# EAGLE board Single_Supply_Logic_Level_Converter-Panel (EAGLE 9.1.0), part 1 of 7
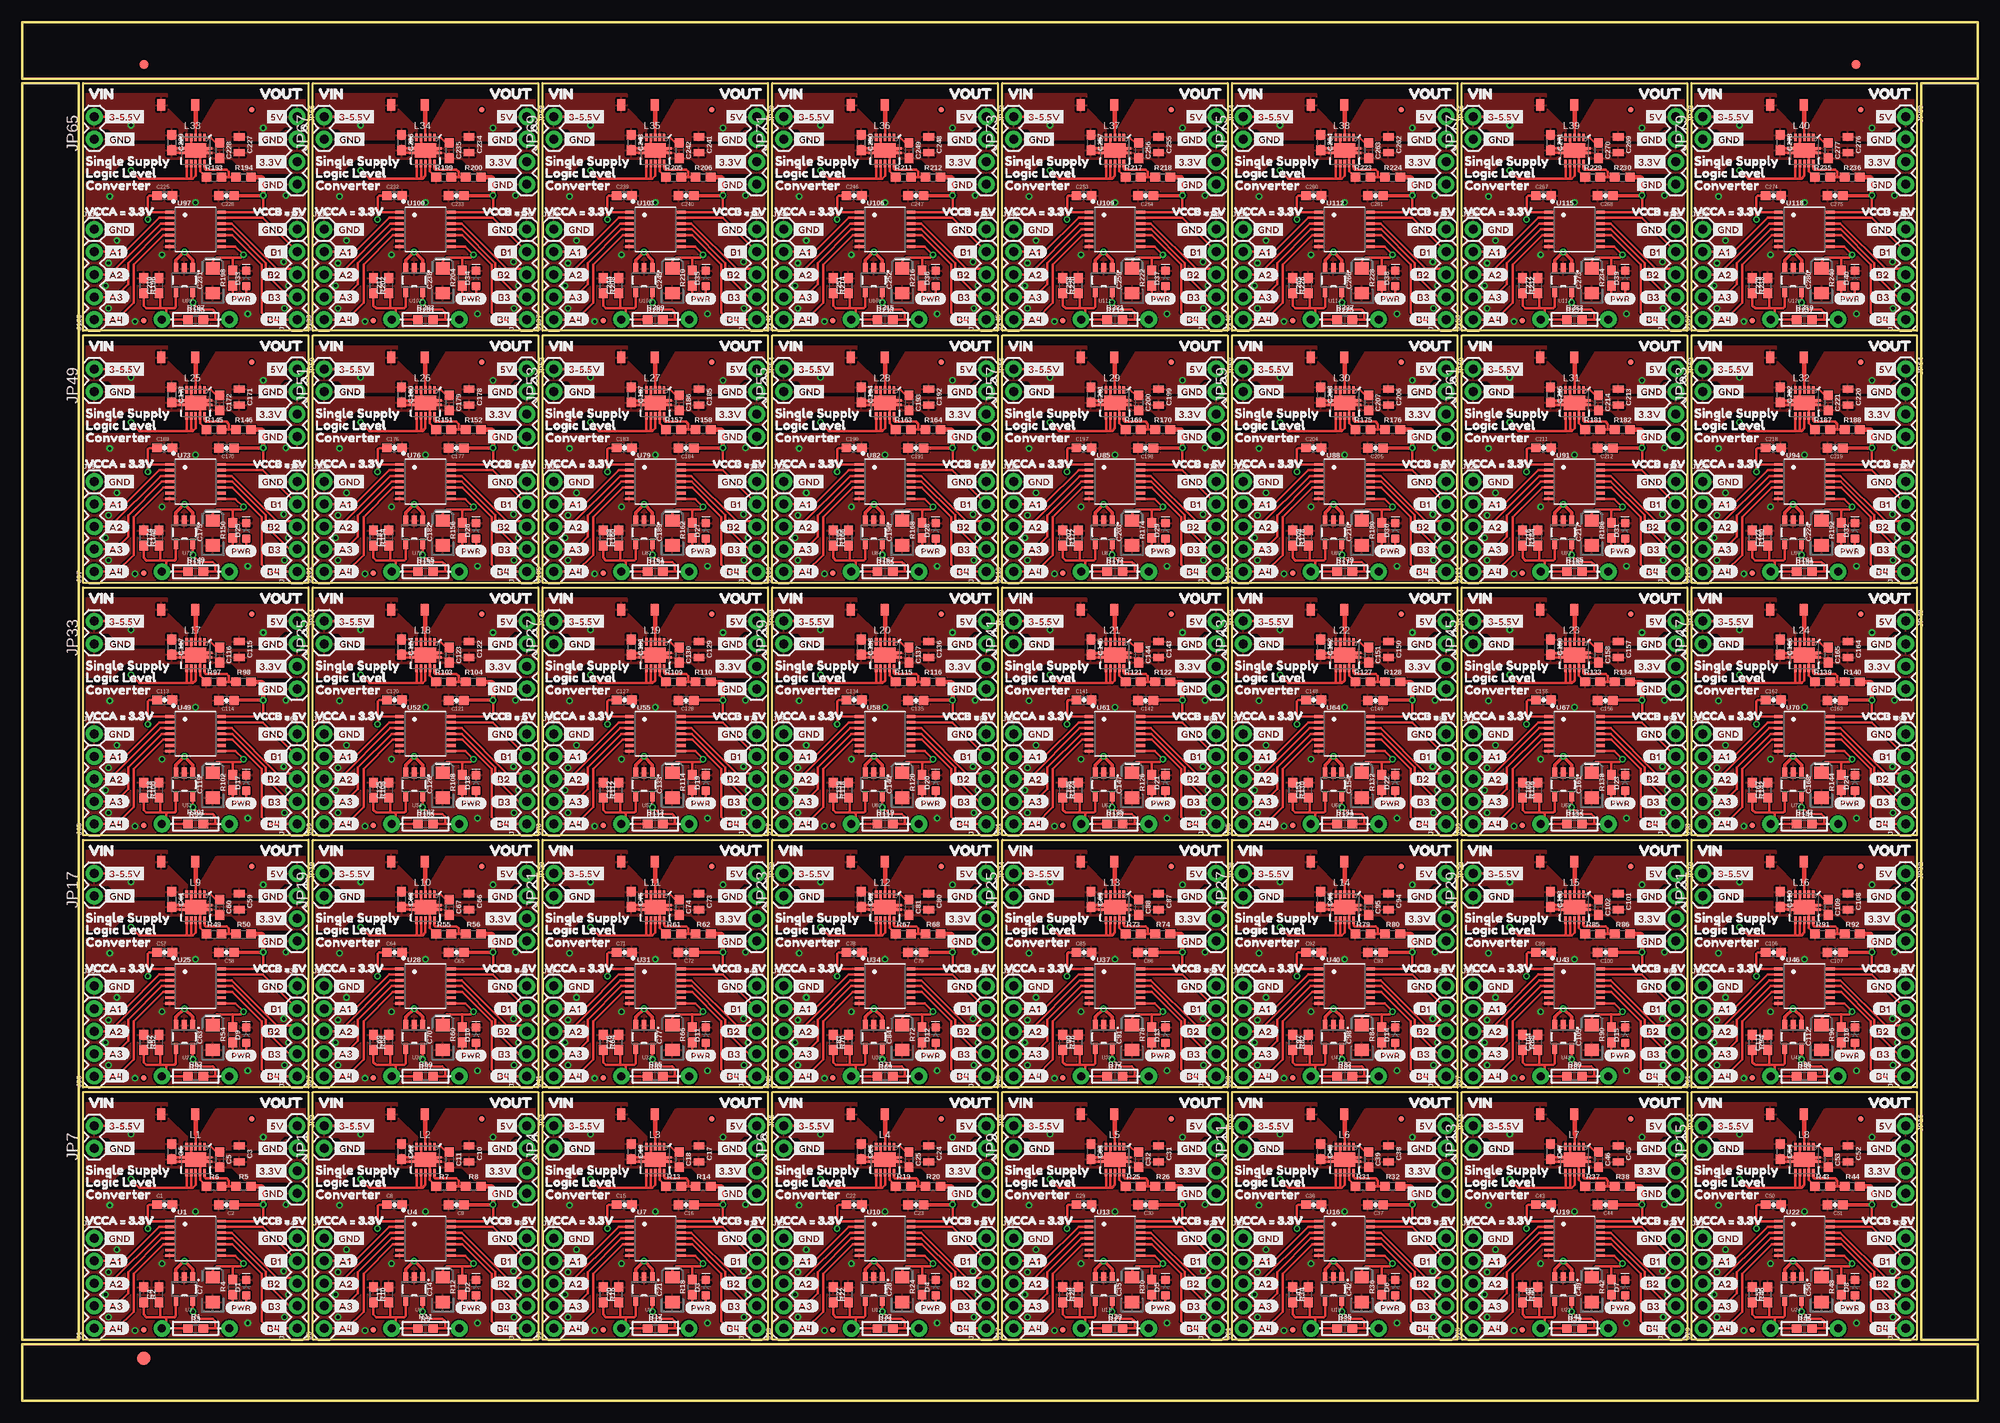
[diagram p0: board, top side]
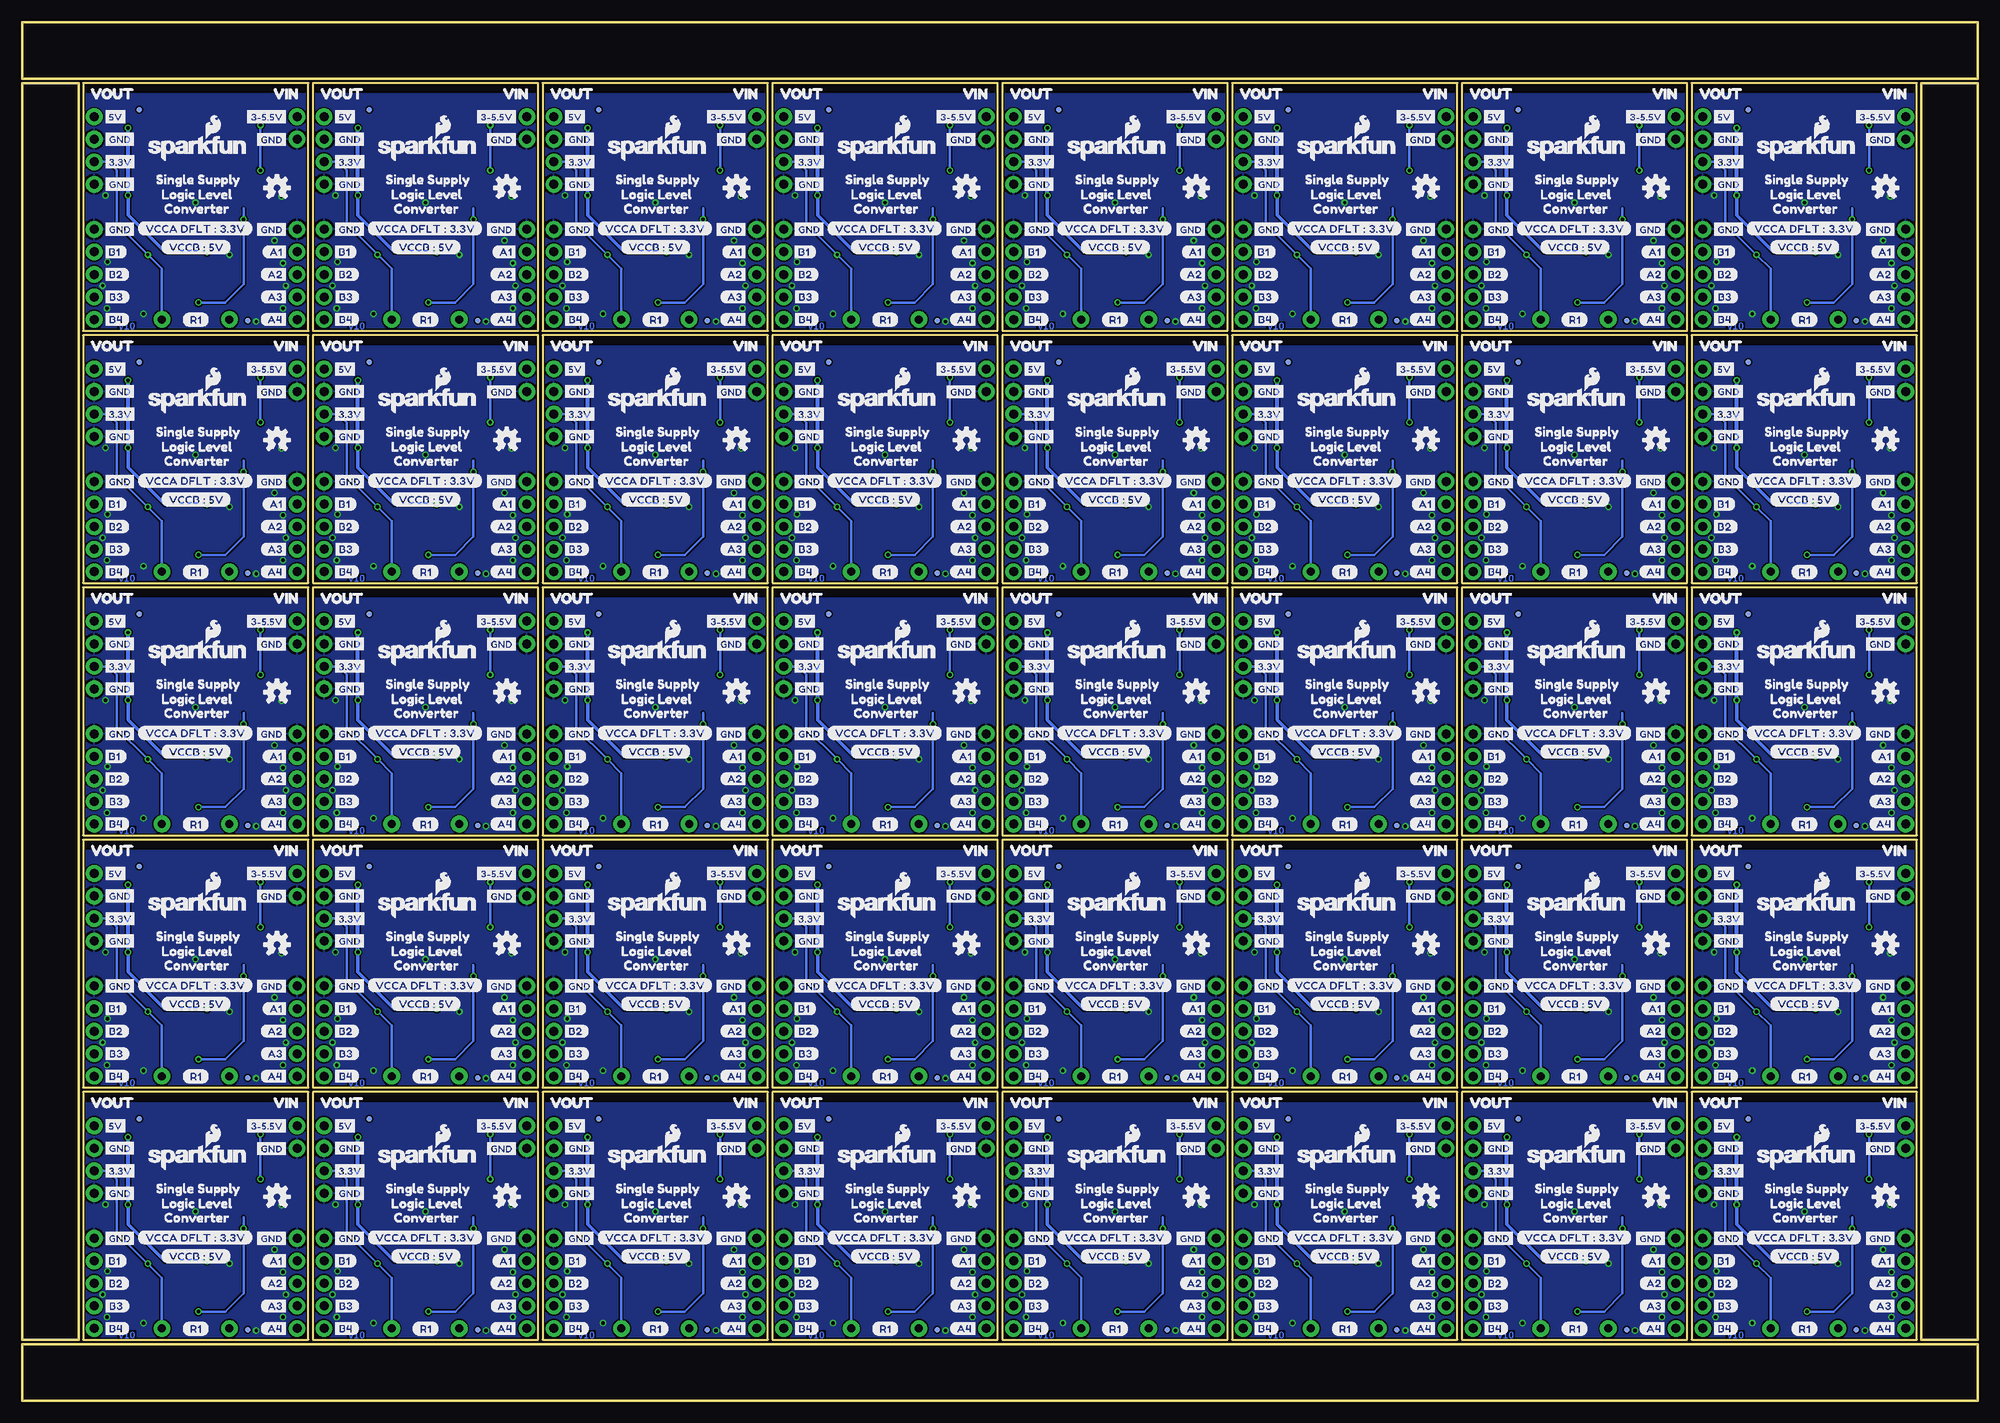
[diagram p1: board, bottom side, seen from below]

Size 220.47 x 155.45 mm. Coordinates in mm from the lower left corner, seen from the top.
Outline: 6.86,6.86 6.86,34.8 32.26,34.8 32.26,6.86 6.86,6.86
Outline: 32.77,6.86 32.77,34.8 58.17,34.8 58.17,6.86 32.77,6.86
Outline: 58.67,6.86 58.67,34.8 84.07,34.8 84.07,6.86 58.67,6.86
Outline: 84.58,6.86 84.58,34.8 109.98,34.8 109.98,6.86 84.58,6.86
Outline: 110.49,6.86 110.49,34.8 135.89,34.8 135.89,6.86 110.49,6.86
Outline: 136.4,6.86 136.4,34.8 161.8,34.8 161.8,6.86 136.4,6.86
Outline: 162.31,6.86 162.31,34.8 187.71,34.8 187.71,6.86 162.31,6.86
Outline: 188.21,6.86 188.21,34.8 213.61,34.8 213.61,6.86 188.21,6.86
Outline: 6.86,35.31 6.86,63.25 32.26,63.25 32.26,35.31 6.86,35.31
Outline: 32.77,35.31 32.77,63.25 58.17,63.25 58.17,35.31 32.77,35.31
Outline: 58.67,35.31 58.67,63.25 84.07,63.25 84.07,35.31 58.67,35.31
Outline: 84.58,35.31 84.58,63.25 109.98,63.25 109.98,35.31 84.58,35.31
Outline: 110.49,35.31 110.49,63.25 135.89,63.25 135.89,35.31 110.49,35.31
Outline: 136.4,35.31 136.4,63.25 161.8,63.25 161.8,35.31 136.4,35.31
Outline: 162.31,35.31 162.31,63.25 187.71,63.25 187.71,35.31 162.31,35.31
Outline: 188.21,35.31 188.21,63.25 213.61,63.25 213.61,35.31 188.21,35.31
Outline: 6.86,63.75 6.86,91.69 32.26,91.69 32.26,63.75 6.86,63.75
Outline: 32.77,63.75 32.77,91.69 58.17,91.69 58.17,63.75 32.77,63.75
Outline: 58.67,63.75 58.67,91.69 84.07,91.69 84.07,63.75 58.67,63.75
Outline: 84.58,63.75 84.58,91.69 109.98,91.69 109.98,63.75 84.58,63.75
Outline: 110.49,63.75 110.49,91.69 135.89,91.69 135.89,63.75 110.49,63.75
Outline: 136.4,63.75 136.4,91.69 161.8,91.69 161.8,63.75 136.4,63.75
Outline: 162.31,63.75 162.31,91.69 187.71,91.69 187.71,63.75 162.31,63.75
Outline: 188.21,63.75 188.21,91.69 213.61,91.69 213.61,63.75 188.21,63.75
Outline: 6.86,92.2 6.86,120.14 32.26,120.14 32.26,92.2 6.86,92.2
Outline: 32.77,92.2 32.77,120.14 58.17,120.14 58.17,92.2 32.77,92.2
Outline: 58.67,92.2 58.67,120.14 84.07,120.14 84.07,92.2 58.67,92.2
Outline: 84.58,92.2 84.58,120.14 109.98,120.14 109.98,92.2 84.58,92.2
Outline: 110.49,92.2 110.49,120.14 135.89,120.14 135.89,92.2 110.49,92.2
Outline: 136.4,92.2 136.4,120.14 161.8,120.14 161.8,92.2 136.4,92.2
Outline: 162.31,92.2 162.31,120.14 187.71,120.14 187.71,92.2 162.31,92.2
Outline: 188.21,92.2 188.21,120.14 213.61,120.14 213.61,92.2 188.21,92.2
Outline: 6.86,120.65 6.86,148.59 32.26,148.59 32.26,120.65 6.86,120.65
Outline: 32.77,120.65 32.77,148.59 58.17,148.59 58.17,120.65 32.77,120.65
Outline: 58.67,120.65 58.67,148.59 84.07,148.59 84.07,120.65 58.67,120.65
Outline: 84.58,120.65 84.58,148.59 109.98,148.59 109.98,120.65 84.58,120.65
Outline: 110.49,120.65 110.49,148.59 135.89,148.59 135.89,120.65 110.49,120.65
Outline: 136.4,120.65 136.4,148.59 161.8,148.59 161.8,120.65 136.4,120.65
Outline: 162.31,120.65 162.31,148.59 187.71,148.59 187.71,120.65 162.31,120.65
Outline: 188.21,120.65 188.21,148.59 213.61,148.59 213.61,120.65 188.21,120.65
Outline: 0,6.35 220.47,6.35 220.47,0 0,0 0,6.35
Outline: 214.12,148.59 220.47,148.59 220.47,6.86 214.12,6.86 214.12,148.59
Outline: 0,155.45 220.47,155.45 220.47,149.1 0,149.1 0,155.45
Outline: 0,148.59 6.35,148.59 6.35,6.86 0,6.86 0,148.59
Copper layers (1*16): Top 0.035mm / dielectric 1.5mm / Bottom 0.035mm
Design rules "SparkFun-2-layer-PCBWay-LIMIT": minimum track width 6mil, minimum drill 0.3mm, track to track 6mil, track to pad 6mil, pad to pad 6mil, via to via 6mil, smd to smd 6mil, copper to edge 6mil, drill to drill 6mil, minimum pad ring 7mil, minimum via ring 7mil, stop-mask expansion 4mil, vias tented up to drill 25mil, thermal gap 10mil
Net classes: 0 Default: width 0.203 mm

## Footprints (pad centres in the part's own frame; a part is rotated, then mirrored left to right if it is on the bottom)
0603-CAP = smd 1.1 x 1: 1 -0.85,0; 2 0.85,0
0805 = smd 0.8 x 1.2: 1 -0.9,0; 2 0.9,0
0603 = smd 1.1 x 1: 1 -0.85,0; 2 0.85,0
EIA3216 = smd 1.4 x 1.6: + 1.4,0; - -1.4,0
LED-0603 = smd 1 x 1: A -0.877,0; C 0.877,0
FIDUCIAL-1X2 = smd 1 x 1: 1 0,0
FIDUCIAL-1.5X3 = smd 1.5 x 1.5: 1 0,0
FIDUCIAL-MICRO = smd 0.635 x 0.635: 1 0,0
1X04 = drill 1.016 pad 1.88: 1 0,0; 2 2.54,0; 3 5.08,0; 4 7.62,0
1X01 = drill 1.016 pad 1.88: 1 0,0
1X02 = drill 1.016 pad 1.88: 1 0,0; 2 2.54,0
INDUCTOR_2.2UH = smd 0.9 x 1.3: P$1 -1.9,0; P$2 1.9,0
AXIAL-0.3 = drill 0.9 pad 1.88: P$1 -3.81,0; P$2 3.81,0
TSSOP14 = smd 0.305 x 0.991: 1 -1.95,-2.918; 2 -1.3,-2.918; 3 -0.65,-2.918; 4 0,-2.918; 5 0.65,-2.918; 6 1.3,-2.918; 7 1.95,-2.918; 8 1.95,2.918; 9 1.3,2.918; 10 0.65,2.918; 11 0,2.918; 12 -0.65,2.918; 13 -1.3,2.918; 14 -1.95,2.918
QFN-10_PAD = smd 0.297 x 0.85: 1 -1,-1.475; 2 -0.5,-1.475; 3 0,-1.475; 4 0.5,-1.475; 5 1,-1.475; 6 1,1.475; 7 0.5,1.475; 8 0,1.475; 9 -0.5,1.475; 10 -1,1.475 | smd 0.7 x 0.28: 11 -1.5,0.25; 12 -1.5,-0.25; 13 1.5,0.25; 14 1.5,-0.25 | smd 2.4 x 1.65: 15 0,0
SOT23-5 = smd 0.55 x 1.2: 1 -0.95,-1.3; 2 0,-1.3; 3 0.95,-1.3; 4 0.95,1.3; 5 -0.95,1.3

## Placement (x,y rotation side)
C1  0.1uF  [0603-CAP]  16.07,22.1 0 top
C2  0.1uF  [0603-CAP]  23.03,22.07 180 top
C3  22uF  [0805]  24.48,27.81 270 top
C4  470pF  [0603]  15.43,11.94 90 top
C5  0.1uF  [0603]  22.26,27.18 270 top
C6  10uF  [0603]  16.86,28.08 270 top
C7  10uF  [EIA3216]  21.49,12.5 90 top
C8  0.1uF  [0603-CAP]  41.97,22.1 0 top
C9  0.1uF  [0603-CAP]  48.94,22.07 180 top
C10  22uF  [0805]  50.39,27.81 270 top
C11  0.1uF  [0603]  48.16,27.18 270 top
C12  10uF  [0603]  42.76,28.08 270 top
C13  470pF  [0603]  41.34,11.94 90 top
C14  10uF  [EIA3216]  47.4,12.5 90 top
C15  0.1uF  [0603-CAP]  67.88,22.1 0 top
C16  0.1uF  [0603-CAP]  74.85,22.07 180 top
C17  22uF  [0805]  76.3,27.81 270 top
C18  0.1uF  [0603]  74.07,27.18 270 top
C19  10uF  [0603]  68.67,28.08 270 top
C20  470pF  [0603]  67.25,11.94 90 top
C21  10uF  [EIA3216]  73.31,12.5 90 top
C22  0.1uF  [0603-CAP]  93.79,22.1 0 top
C23  0.1uF  [0603-CAP]  100.76,22.07 180 top
C24  22uF  [0805]  102.2,27.81 270 top
C25  0.1uF  [0603]  99.98,27.18 270 top
C26  10uF  [0603]  94.58,28.08 270 top
C27  470pF  [0603]  93.15,11.94 90 top
C28  10uF  [EIA3216]  99.22,12.5 90 top
C29  0.1uF  [0603-CAP]  119.7,22.1 0 top
C30  0.1uF  [0603-CAP]  126.66,22.07 180 top
C31  22uF  [0805]  128.11,27.81 270 top
C32  0.1uF  [0603]  125.89,27.18 270 top
C33  10uF  [0603]  120.49,28.08 270 top
C34  470pF  [0603]  119.06,11.94 90 top
C35  10uF  [EIA3216]  125.13,12.5 90 top
C36  0.1uF  [0603-CAP]  145.61,22.1 0 top
C37  0.1uF  [0603-CAP]  152.57,22.07 180 top
C38  22uF  [0805]  154.02,27.81 270 top
C39  0.1uF  [0603]  151.8,27.18 270 top
C40  10uF  [0603]  146.4,28.08 270 top
C41  470pF  [0603]  144.97,11.94 90 top
C42  10uF  [EIA3216]  151.03,12.5 90 top
C43  0.1uF  [0603-CAP]  171.51,22.1 0 top
C44  0.1uF  [0603-CAP]  178.48,22.07 180 top
C45  22uF  [0805]  179.93,27.81 270 top
C46  0.1uF  [0603]  177.7,27.18 270 top
C47  10uF  [0603]  172.3,28.08 270 top
C48  470pF  [0603]  170.88,11.94 90 top
C49  10uF  [EIA3216]  176.94,12.5 90 top
C50  0.1uF  [0603-CAP]  197.42,22.1 0 top
C51  0.1uF  [0603-CAP]  204.39,22.07 180 top
C52  22uF  [0805]  205.84,27.81 270 top
C53  0.1uF  [0603]  203.61,27.18 270 top
C54  10uF  [0603]  198.21,28.08 270 top
C55  470pF  [0603]  196.79,11.94 90 top
C56  10uF  [EIA3216]  202.85,12.5 90 top
C57  0.1uF  [0603-CAP]  16.07,50.55 0 top
C58  0.1uF  [0603-CAP]  23.03,50.52 180 top
C59  22uF  [0805]  24.48,56.26 270 top
C60  0.1uF  [0603]  22.26,55.63 270 top
C61  10uF  [0603]  16.86,56.52 270 top
C62  470pF  [0603]  15.43,40.39 90 top
C63  10uF  [EIA3216]  21.49,40.94 90 top
C64  0.1uF  [0603-CAP]  41.97,50.55 0 top
C65  0.1uF  [0603-CAP]  48.94,50.52 180 top
C66  22uF  [0805]  50.39,56.26 270 top
C67  0.1uF  [0603]  48.16,55.63 270 top
C68  10uF  [0603]  42.76,56.52 270 top
C69  470pF  [0603]  41.34,40.39 90 top
C70  10uF  [EIA3216]  47.4,40.94 90 top
C71  0.1uF  [0603-CAP]  67.88,50.55 0 top
C72  0.1uF  [0603-CAP]  74.85,50.52 180 top
C73  22uF  [0805]  76.3,56.26 270 top
C74  0.1uF  [0603]  74.07,55.63 270 top
C75  10uF  [0603]  68.67,56.52 270 top
C76  470pF  [0603]  67.25,40.39 90 top
C77  10uF  [EIA3216]  73.31,40.94 90 top
C78  0.1uF  [0603-CAP]  93.79,50.55 0 top
C79  0.1uF  [0603-CAP]  100.76,50.52 180 top
C80  22uF  [0805]  102.2,56.26 270 top
C81  0.1uF  [0603]  99.98,55.63 270 top
C82  10uF  [0603]  94.58,56.52 270 top
C83  470pF  [0603]  93.15,40.39 90 top
C84  10uF  [EIA3216]  99.22,40.94 90 top
C85  0.1uF  [0603-CAP]  119.7,50.55 0 top
C86  0.1uF  [0603-CAP]  126.66,50.52 180 top
C87  22uF  [0805]  128.11,56.26 270 top
C88  0.1uF  [0603]  125.89,55.63 270 top
C89  10uF  [0603]  120.49,56.52 270 top
C90  470pF  [0603]  119.06,40.39 90 top
C91  10uF  [EIA3216]  125.13,40.94 90 top
C92  0.1uF  [0603-CAP]  145.61,50.55 0 top
C93  0.1uF  [0603-CAP]  152.57,50.52 180 top
C94  22uF  [0805]  154.02,56.26 270 top
C95  0.1uF  [0603]  151.8,55.63 270 top
C96  10uF  [0603]  146.4,56.52 270 top
C97  470pF  [0603]  144.97,40.39 90 top
C98  10uF  [EIA3216]  151.03,40.94 90 top
C99  0.1uF  [0603-CAP]  171.51,50.55 0 top
C100  0.1uF  [0603-CAP]  178.48,50.52 180 top
C101  22uF  [0805]  179.93,56.26 270 top
C102  0.1uF  [0603]  177.7,55.63 270 top
C103  10uF  [0603]  172.3,56.52 270 top
C104  470pF  [0603]  170.88,40.39 90 top
C105  10uF  [EIA3216]  176.94,40.94 90 top
C106  0.1uF  [0603-CAP]  197.42,50.55 0 top
C107  0.1uF  [0603-CAP]  204.39,50.52 180 top
C108  22uF  [0805]  205.84,56.26 270 top
C109  0.1uF  [0603]  203.61,55.63 270 top
C110  10uF  [0603]  198.21,56.52 270 top
C111  470pF  [0603]  196.79,40.39 90 top
C112  10uF  [EIA3216]  202.85,40.94 90 top
C113  0.1uF  [0603-CAP]  16.07,78.99 0 top
C114  0.1uF  [0603-CAP]  23.03,78.97 180 top
C115  22uF  [0805]  24.48,84.71 270 top
C116  0.1uF  [0603]  22.26,84.07 270 top
C117  10uF  [0603]  16.86,84.97 270 top
C118  470pF  [0603]  15.43,68.83 90 top
C119  10uF  [EIA3216]  21.49,69.39 90 top
C120  0.1uF  [0603-CAP]  41.97,78.99 0 top
C121  0.1uF  [0603-CAP]  48.94,78.97 180 top
C122  22uF  [0805]  50.39,84.71 270 top
C123  0.1uF  [0603]  48.16,84.07 270 top
C124  10uF  [0603]  42.76,84.97 270 top
C125  470pF  [0603]  41.34,68.83 90 top
C126  10uF  [EIA3216]  47.4,69.39 90 top
C127  0.1uF  [0603-CAP]  67.88,78.99 0 top
C128  0.1uF  [0603-CAP]  74.85,78.97 180 top
C129  22uF  [0805]  76.3,84.71 270 top
C130  0.1uF  [0603]  74.07,84.07 270 top
C131  10uF  [0603]  68.67,84.97 270 top
C132  470pF  [0603]  67.25,68.83 90 top
C133  10uF  [EIA3216]  73.31,69.39 90 top
C134  0.1uF  [0603-CAP]  93.79,78.99 0 top
C135  0.1uF  [0603-CAP]  100.76,78.97 180 top
C136  22uF  [0805]  102.2,84.71 270 top
C137  0.1uF  [0603]  99.98,84.07 270 top
C138  10uF  [0603]  94.58,84.97 270 top
C139  470pF  [0603]  93.15,68.83 90 top
C140  10uF  [EIA3216]  99.22,69.39 90 top
C141  0.1uF  [0603-CAP]  119.7,78.99 0 top
C142  0.1uF  [0603-CAP]  126.66,78.97 180 top
C143  22uF  [0805]  128.11,84.71 270 top
C144  0.1uF  [0603]  125.89,84.07 270 top
C145  10uF  [0603]  120.49,84.97 270 top
C146  470pF  [0603]  119.06,68.83 90 top
C147  10uF  [EIA3216]  125.13,69.39 90 top
C148  0.1uF  [0603-CAP]  145.61,78.99 0 top
C149  0.1uF  [0603-CAP]  152.57,78.97 180 top
C150  22uF  [0805]  154.02,84.71 270 top
C151  0.1uF  [0603]  151.8,84.07 270 top
C152  10uF  [0603]  146.4,84.97 270 top
C153  470pF  [0603]  144.97,68.83 90 top
C154  10uF  [EIA3216]  151.03,69.39 90 top
C155  0.1uF  [0603-CAP]  171.51,78.99 0 top
C156  0.1uF  [0603-CAP]  178.48,78.97 180 top
C157  22uF  [0805]  179.93,84.71 270 top
C158  0.1uF  [0603]  177.7,84.07 270 top
C159  10uF  [0603]  172.3,84.97 270 top
C160  470pF  [0603]  170.88,68.83 90 top
C161  10uF  [EIA3216]  176.94,69.39 90 top
C162  0.1uF  [0603-CAP]  197.42,78.99 0 top
C163  0.1uF  [0603-CAP]  204.39,78.97 180 top
C164  22uF  [0805]  205.84,84.71 270 top
C165  0.1uF  [0603]  203.61,84.07 270 top
C166  10uF  [0603]  198.21,84.97 270 top
C167  470pF  [0603]  196.79,68.83 90 top
C168  10uF  [EIA3216]  202.85,69.39 90 top
C169  0.1uF  [0603-CAP]  16.07,107.44 0 top
C170  0.1uF  [0603-CAP]  23.03,107.42 180 top
C171  22uF  [0805]  24.48,113.16 270 top
C172  0.1uF  [0603]  22.26,112.52 270 top
C173  10uF  [0603]  16.86,113.42 270 top
C174  470pF  [0603]  15.43,97.28 90 top
C175  10uF  [EIA3216]  21.49,97.84 90 top
C176  0.1uF  [0603-CAP]  41.97,107.44 0 top
C177  0.1uF  [0603-CAP]  48.94,107.42 180 top
C178  22uF  [0805]  50.39,113.16 270 top
C179  0.1uF  [0603]  48.16,112.52 270 top
C180  10uF  [0603]  42.76,113.42 270 top
C181  470pF  [0603]  41.34,97.28 90 top
C182  10uF  [EIA3216]  47.4,97.84 90 top
C183  0.1uF  [0603-CAP]  67.88,107.44 0 top
C184  0.1uF  [0603-CAP]  74.85,107.42 180 top
C185  22uF  [0805]  76.3,113.16 270 top
C186  0.1uF  [0603]  74.07,112.52 270 top
C187  10uF  [0603]  68.67,113.42 270 top
C188  470pF  [0603]  67.25,97.28 90 top
C189  10uF  [EIA3216]  73.31,97.84 90 top
C190  0.1uF  [0603-CAP]  93.79,107.44 0 top
C191  0.1uF  [0603-CAP]  100.76,107.42 180 top
C192  22uF  [0805]  102.2,113.16 270 top
C193  0.1uF  [0603]  99.98,112.52 270 top
C194  10uF  [0603]  94.58,113.42 270 top
C195  470pF  [0603]  93.15,97.28 90 top
C196  10uF  [EIA3216]  99.22,97.84 90 top
C197  0.1uF  [0603-CAP]  119.7,107.44 0 top
C198  0.1uF  [0603-CAP]  126.66,107.42 180 top
C199  22uF  [0805]  128.11,113.16 270 top
C200  0.1uF  [0603]  125.89,112.52 270 top
C201  10uF  [0603]  120.49,113.42 270 top
C202  470pF  [0603]  119.06,97.28 90 top
C203  10uF  [EIA3216]  125.13,97.84 90 top
C204  0.1uF  [0603-CAP]  145.61,107.44 0 top
C205  0.1uF  [0603-CAP]  152.57,107.42 180 top
C206  22uF  [0805]  154.02,113.16 270 top
C207  0.1uF  [0603]  151.8,112.52 270 top
C208  10uF  [0603]  146.4,113.42 270 top
C209  470pF  [0603]  144.97,97.28 90 top
C210  10uF  [EIA3216]  151.03,97.84 90 top
C211  0.1uF  [0603-CAP]  171.51,107.44 0 top
C212  0.1uF  [0603-CAP]  178.48,107.42 180 top
C213  22uF  [0805]  179.93,113.16 270 top
C214  0.1uF  [0603]  177.7,112.52 270 top
C215  10uF  [0603]  172.3,113.42 270 top
C216  470pF  [0603]  170.88,97.28 90 top
C217  10uF  [EIA3216]  176.94,97.84 90 top
C218  0.1uF  [0603-CAP]  197.42,107.44 0 top
C219  0.1uF  [0603-CAP]  204.39,107.42 180 top
C220  22uF  [0805]  205.84,113.16 270 top
C221  0.1uF  [0603]  203.61,112.52 270 top
C222  10uF  [0603]  198.21,113.42 270 top
C223  470pF  [0603]  196.79,97.28 90 top
C224  10uF  [EIA3216]  202.85,97.84 90 top
C225  0.1uF  [0603-CAP]  16.07,135.89 0 top
C226  0.1uF  [0603-CAP]  23.03,135.86 180 top
C227  22uF  [0805]  24.48,141.61 270 top
C228  0.1uF  [0603]  22.26,140.97 270 top
C229  10uF  [0603]  16.86,141.87 270 top
C230  470pF  [0603]  15.43,125.73 90 top
C231  10uF  [EIA3216]  21.49,126.29 90 top
C232  0.1uF  [0603-CAP]  41.97,135.89 0 top
C233  0.1uF  [0603-CAP]  48.94,135.86 180 top
C234  22uF  [0805]  50.39,141.61 270 top
C235  0.1uF  [0603]  48.16,140.97 270 top
C236  10uF  [0603]  42.76,141.87 270 top
C237  470pF  [0603]  41.34,125.73 90 top
C238  10uF  [EIA3216]  47.4,126.29 90 top
C239  0.1uF  [0603-CAP]  67.88,135.89 0 top
C240  0.1uF  [0603-CAP]  74.85,135.86 180 top
C241  22uF  [0805]  76.3,141.61 270 top
C242  0.1uF  [0603]  74.07,140.97 270 top
C243  10uF  [0603]  68.67,141.87 270 top
C244  470pF  [0603]  67.25,125.73 90 top
C245  10uF  [EIA3216]  73.31,126.29 90 top
C246  0.1uF  [0603-CAP]  93.79,135.89 0 top
C247  0.1uF  [0603-CAP]  100.76,135.86 180 top
C248  22uF  [0805]  102.2,141.61 270 top
C249  0.1uF  [0603]  99.98,140.97 270 top
C250  10uF  [0603]  94.58,141.87 270 top
C251  470pF  [0603]  93.15,125.73 90 top
C252  10uF  [EIA3216]  99.22,126.29 90 top
C253  0.1uF  [0603-CAP]  119.7,135.89 0 top
C254  0.1uF  [0603-CAP]  126.66,135.86 180 top
C255  22uF  [0805]  128.11,141.61 270 top
C256  0.1uF  [0603]  125.89,140.97 270 top
C257  10uF  [0603]  120.49,141.87 270 top
C258  470pF  [0603]  119.06,125.73 90 top
C259  10uF  [EIA3216]  125.13,126.29 90 top
C260  0.1uF  [0603-CAP]  145.61,135.89 0 top
C261  0.1uF  [0603-CAP]  152.57,135.86 180 top
C262  22uF  [0805]  154.02,141.61 270 top
C263  0.1uF  [0603]  151.8,140.97 270 top
C264  10uF  [0603]  146.4,141.87 270 top
C265  470pF  [0603]  144.97,125.73 90 top
C266  10uF  [EIA3216]  151.03,126.29 90 top
C267  0.1uF  [0603-CAP]  171.51,135.89 0 top
C268  0.1uF  [0603-CAP]  178.48,135.86 180 top
C269  22uF  [0805]  179.93,141.61 270 top
C270  0.1uF  [0603]  177.7,140.97 270 top
C271  10uF  [0603]  172.3,141.87 270 top
C272  470pF  [0603]  170.88,125.73 90 top
C273  10uF  [EIA3216]  176.94,126.29 90 top
C274  0.1uF  [0603-CAP]  197.42,135.89 0 top
C275  0.1uF  [0603-CAP]  204.39,135.86 180 top
C276  22uF  [0805]  205.84,141.61 270 top
C277  0.1uF  [0603]  203.61,140.97 270 top
C278  10uF  [0603]  198.21,141.87 270 top
C279  470pF  [0603]  196.79,125.73 90 top
C280  10uF  [EIA3216]  202.85,126.29 90 top
D1  RED  [LED-0603]  25.26,12.75 90 top
D2  RED  [LED-0603]  51.17,12.75 90 top
D3  RED  [LED-0603]  77.08,12.75 90 top
D4  RED  [LED-0603]  102.98,12.75 90 top
D5  RED  [LED-0603]  128.89,12.75 90 top
D6  RED  [LED-0603]  154.8,12.75 90 top
D7  RED  [LED-0603]  180.71,12.75 90 top
D8  RED  [LED-0603]  206.62,12.75 90 top
D9  RED  [LED-0603]  25.26,41.2 90 top
D10  RED  [LED-0603]  51.17,41.2 90 top
D11  RED  [LED-0603]  77.08,41.2 90 top
D12  RED  [LED-0603]  102.98,41.2 90 top
D13  RED  [LED-0603]  128.89,41.2 90 top
D14  RED  [LED-0603]  154.8,41.2 90 top
D15  RED  [LED-0603]  180.71,41.2 90 top
D16  RED  [LED-0603]  206.62,41.2 90 top
D17  RED  [LED-0603]  25.26,69.65 90 top
D18  RED  [LED-0603]  51.17,69.65 90 top
D19  RED  [LED-0603]  77.08,69.65 90 top
D20  RED  [LED-0603]  102.98,69.65 90 top
D21  RED  [LED-0603]  128.89,69.65 90 top
D22  RED  [LED-0603]  154.8,69.65 90 top
D23  RED  [LED-0603]  180.71,69.65 90 top
D24  RED  [LED-0603]  206.62,69.65 90 top
D25  RED  [LED-0603]  25.26,98.09 90 top
D26  RED  [LED-0603]  51.17,98.09 90 top
D27  RED  [LED-0603]  77.08,98.09 90 top
D28  RED  [LED-0603]  102.98,98.09 90 top
D29  RED  [LED-0603]  128.89,98.09 90 top
D30  RED  [LED-0603]  154.8,98.09 90 top
D31  RED  [LED-0603]  180.71,98.09 90 top
D32  RED  [LED-0603]  206.62,98.09 90 top
D33  RED  [LED-0603]  25.26,126.54 90 top
D34  RED  [LED-0603]  51.17,126.54 90 top
D35  RED  [LED-0603]  77.08,126.54 90 top
D36  RED  [LED-0603]  102.98,126.54 90 top
D37  RED  [LED-0603]  128.89,126.54 90 top
D38  RED  [LED-0603]  154.8,126.54 90 top
D39  RED  [LED-0603]  180.71,126.54 90 top
D40  RED  [LED-0603]  206.62,126.54 90 top
E$1  [FIDUCIAL-1X2]  13.72,150.69 0 top
E$2  [FIDUCIAL-1X2]  206.76,150.69 0 top
E$3  [FIDUCIAL-1.5X3]  13.72,4.76 0 top
FD1  FIDUCIALUFIDUCIAL  [FIDUCIAL-MICRO]  25.91,31.78 0 top
FD2  FIDUCIALUFIDUCIAL  [FIDUCIAL-MICRO]  25.91,31.78 0 bottom
FD3  FIDUCIALUFIDUCIAL  [FIDUCIAL-MICRO]  13.68,7.97 0 top
FD4  FIDUCIALUFIDUCIAL  [FIDUCIAL-MICRO]  13.68,7.97 0 bottom
FD5  FIDUCIALUFIDUCIAL  [FIDUCIAL-MICRO]  51.82,31.78 0 top
FD6  FIDUCIALUFIDUCIAL  [FIDUCIAL-MICRO]  51.82,31.78 0 bottom
FD7  FIDUCIALUFIDUCIAL  [FIDUCIAL-MICRO]  39.59,7.97 0 bottom
FD8  FIDUCIALUFIDUCIAL  [FIDUCIAL-MICRO]  39.59,7.97 0 top
FD9  FIDUCIALUFIDUCIAL  [FIDUCIAL-MICRO]  77.72,31.78 0 top
FD10  FIDUCIALUFIDUCIAL  [FIDUCIAL-MICRO]  77.72,31.78 0 bottom
FD11  FIDUCIALUFIDUCIAL  [FIDUCIAL-MICRO]  65.5,7.97 0 bottom
FD12  FIDUCIALUFIDUCIAL  [FIDUCIAL-MICRO]  65.5,7.97 0 top
FD13  FIDUCIALUFIDUCIAL  [FIDUCIAL-MICRO]  103.63,31.78 0 top
FD14  FIDUCIALUFIDUCIAL  [FIDUCIAL-MICRO]  103.63,31.78 0 bottom
FD15  FIDUCIALUFIDUCIAL  [FIDUCIAL-MICRO]  91.41,7.97 0 bottom
FD16  FIDUCIALUFIDUCIAL  [FIDUCIAL-MICRO]  91.41,7.97 0 top
FD17  FIDUCIALUFIDUCIAL  [FIDUCIAL-MICRO]  129.54,31.78 0 top
FD18  FIDUCIALUFIDUCIAL  [FIDUCIAL-MICRO]  129.54,31.78 0 bottom
FD19  FIDUCIALUFIDUCIAL  [FIDUCIAL-MICRO]  117.32,7.97 0 bottom
FD20  FIDUCIALUFIDUCIAL  [FIDUCIAL-MICRO]  117.32,7.97 0 top
FD21  FIDUCIALUFIDUCIAL  [FIDUCIAL-MICRO]  155.45,31.78 0 top
FD22  FIDUCIALUFIDUCIAL  [FIDUCIAL-MICRO]  155.45,31.78 0 bottom
FD23  FIDUCIALUFIDUCIAL  [FIDUCIAL-MICRO]  143.22,7.97 0 bottom
FD24  FIDUCIALUFIDUCIAL  [FIDUCIAL-MICRO]  143.22,7.97 0 top
FD25  FIDUCIALUFIDUCIAL  [FIDUCIAL-MICRO]  181.36,31.78 0 top
FD26  FIDUCIALUFIDUCIAL  [FIDUCIAL-MICRO]  181.36,31.78 0 bottom
FD27  FIDUCIALUFIDUCIAL  [FIDUCIAL-MICRO]  169.13,7.97 0 bottom
FD28  FIDUCIALUFIDUCIAL  [FIDUCIAL-MICRO]  169.13,7.97 0 top
FD29  FIDUCIALUFIDUCIAL  [FIDUCIAL-MICRO]  207.26,31.78 0 top
FD30  FIDUCIALUFIDUCIAL  [FIDUCIAL-MICRO]  207.26,31.78 0 bottom
FD31  FIDUCIALUFIDUCIAL  [FIDUCIAL-MICRO]  195.04,7.97 0 bottom
FD32  FIDUCIALUFIDUCIAL  [FIDUCIAL-MICRO]  195.04,7.97 0 top
FD33  FIDUCIALUFIDUCIAL  [FIDUCIAL-MICRO]  25.91,60.23 0 top
FD34  FIDUCIALUFIDUCIAL  [FIDUCIAL-MICRO]  25.91,60.23 0 bottom
FD35  FIDUCIALUFIDUCIAL  [FIDUCIAL-MICRO]  13.68,36.42 0 bottom
FD36  FIDUCIALUFIDUCIAL  [FIDUCIAL-MICRO]  13.68,36.42 0 top
FD37  FIDUCIALUFIDUCIAL  [FIDUCIAL-MICRO]  51.82,60.23 0 top
FD38  FIDUCIALUFIDUCIAL  [FIDUCIAL-MICRO]  51.82,60.23 0 bottom
FD39  FIDUCIALUFIDUCIAL  [FIDUCIAL-MICRO]  39.59,36.42 0 bottom
FD40  FIDUCIALUFIDUCIAL  [FIDUCIAL-MICRO]  39.59,36.42 0 top
FD41  FIDUCIALUFIDUCIAL  [FIDUCIAL-MICRO]  77.72,60.23 0 top
FD42  FIDUCIALUFIDUCIAL  [FIDUCIAL-MICRO]  77.72,60.23 0 bottom
FD43  FIDUCIALUFIDUCIAL  [FIDUCIAL-MICRO]  65.5,36.42 0 bottom
FD44  FIDUCIALUFIDUCIAL  [FIDUCIAL-MICRO]  65.5,36.42 0 top
FD45  FIDUCIALUFIDUCIAL  [FIDUCIAL-MICRO]  103.63,60.23 0 top
FD46  FIDUCIALUFIDUCIAL  [FIDUCIAL-MICRO]  103.63,60.23 0 bottom
FD47  FIDUCIALUFIDUCIAL  [FIDUCIAL-MICRO]  91.41,36.42 0 bottom
FD48  FIDUCIALUFIDUCIAL  [FIDUCIAL-MICRO]  91.41,36.42 0 top
FD49  FIDUCIALUFIDUCIAL  [FIDUCIAL-MICRO]  129.54,60.23 0 top
FD50  FIDUCIALUFIDUCIAL  [FIDUCIAL-MICRO]  129.54,60.23 0 bottom
FD51  FIDUCIALUFIDUCIAL  [FIDUCIAL-MICRO]  117.32,36.42 0 bottom
FD52  FIDUCIALUFIDUCIAL  [FIDUCIAL-MICRO]  117.32,36.42 0 top
FD53  FIDUCIALUFIDUCIAL  [FIDUCIAL-MICRO]  155.45,60.23 0 top
FD54  FIDUCIALUFIDUCIAL  [FIDUCIAL-MICRO]  155.45,60.23 0 bottom
FD55  FIDUCIALUFIDUCIAL  [FIDUCIAL-MICRO]  143.22,36.42 0 bottom
FD56  FIDUCIALUFIDUCIAL  [FIDUCIAL-MICRO]  143.22,36.42 0 top
FD57  FIDUCIALUFIDUCIAL  [FIDUCIAL-MICRO]  181.36,60.23 0 top
FD58  FIDUCIALUFIDUCIAL  [FIDUCIAL-MICRO]  181.36,60.23 0 bottom
FD59  FIDUCIALUFIDUCIAL  [FIDUCIAL-MICRO]  169.13,36.42 0 bottom
FD60  FIDUCIALUFIDUCIAL  [FIDUCIAL-MICRO]  169.13,36.42 0 top
FD61  FIDUCIALUFIDUCIAL  [FIDUCIAL-MICRO]  207.26,60.23 0 top
FD62  FIDUCIALUFIDUCIAL  [FIDUCIAL-MICRO]  207.26,60.23 0 bottom
FD63  FIDUCIALUFIDUCIAL  [FIDUCIAL-MICRO]  195.04,36.42 0 bottom
FD64  FIDUCIALUFIDUCIAL  [FIDUCIAL-MICRO]  195.04,36.42 0 top
FD65  FIDUCIALUFIDUCIAL  [FIDUCIAL-MICRO]  25.91,88.68 0 top
FD66  FIDUCIALUFIDUCIAL  [FIDUCIAL-MICRO]  25.91,88.68 0 bottom
FD67  FIDUCIALUFIDUCIAL  [FIDUCIAL-MICRO]  13.68,64.87 0 bottom
FD68  FIDUCIALUFIDUCIAL  [FIDUCIAL-MICRO]  13.68,64.87 0 top
FD69  FIDUCIALUFIDUCIAL  [FIDUCIAL-MICRO]  51.82,88.68 0 top
FD70  FIDUCIALUFIDUCIAL  [FIDUCIAL-MICRO]  51.82,88.68 0 bottom
FD71  FIDUCIALUFIDUCIAL  [FIDUCIAL-MICRO]  39.59,64.87 0 bottom
FD72  FIDUCIALUFIDUCIAL  [FIDUCIAL-MICRO]  39.59,64.87 0 top
FD73  FIDUCIALUFIDUCIAL  [FIDUCIAL-MICRO]  77.72,88.68 0 top
FD74  FIDUCIALUFIDUCIAL  [FIDUCIAL-MICRO]  77.72,88.68 0 bottom
FD75  FIDUCIALUFIDUCIAL  [FIDUCIAL-MICRO]  65.5,64.87 0 bottom
FD76  FIDUCIALUFIDUCIAL  [FIDUCIAL-MICRO]  65.5,64.87 0 top
FD77  FIDUCIALUFIDUCIAL  [FIDUCIAL-MICRO]  103.63,88.68 0 top
FD78  FIDUCIALUFIDUCIAL  [FIDUCIAL-MICRO]  103.63,88.68 0 bottom
FD79  FIDUCIALUFIDUCIAL  [FIDUCIAL-MICRO]  91.41,64.87 0 bottom
FD80  FIDUCIALUFIDUCIAL  [FIDUCIAL-MICRO]  91.41,64.87 0 top
FD81  FIDUCIALUFIDUCIAL  [FIDUCIAL-MICRO]  129.54,88.68 0 top
FD82  FIDUCIALUFIDUCIAL  [FIDUCIAL-MICRO]  129.54,88.68 0 bottom
FD83  FIDUCIALUFIDUCIAL  [FIDUCIAL-MICRO]  117.32,64.87 0 bottom
FD84  FIDUCIALUFIDUCIAL  [FIDUCIAL-MICRO]  117.32,64.87 0 top
FD85  FIDUCIALUFIDUCIAL  [FIDUCIAL-MICRO]  155.45,88.68 0 top
FD86  FIDUCIALUFIDUCIAL  [FIDUCIAL-MICRO]  155.45,88.68 0 bottom
FD87  FIDUCIALUFIDUCIAL  [FIDUCIAL-MICRO]  143.22,64.87 0 bottom
FD88  FIDUCIALUFIDUCIAL  [FIDUCIAL-MICRO]  143.22,64.87 0 top
FD89  FIDUCIALUFIDUCIAL  [FIDUCIAL-MICRO]  181.36,88.68 0 top
FD90  FIDUCIALUFIDUCIAL  [FIDUCIAL-MICRO]  181.36,88.68 0 bottom
FD91  FIDUCIALUFIDUCIAL  [FIDUCIAL-MICRO]  169.13,64.87 0 bottom
FD92  FIDUCIALUFIDUCIAL  [FIDUCIAL-MICRO]  169.13,64.87 0 top
FD93  FIDUCIALUFIDUCIAL  [FIDUCIAL-MICRO]  207.26,88.68 0 top
FD94  FIDUCIALUFIDUCIAL  [FIDUCIAL-MICRO]  207.26,88.68 0 bottom
FD95  FIDUCIALUFIDUCIAL  [FIDUCIAL-MICRO]  195.04,64.87 0 bottom
FD96  FIDUCIALUFIDUCIAL  [FIDUCIAL-MICRO]  195.04,64.87 0 top
FD97  FIDUCIALUFIDUCIAL  [FIDUCIAL-MICRO]  25.91,117.13 0 top
FD98  FIDUCIALUFIDUCIAL  [FIDUCIAL-MICRO]  25.91,117.13 0 bottom
FD99  FIDUCIALUFIDUCIAL  [FIDUCIAL-MICRO]  13.68,93.31 0 bottom
FD100  FIDUCIALUFIDUCIAL  [FIDUCIAL-MICRO]  13.68,93.31 0 top
FD101  FIDUCIALUFIDUCIAL  [FIDUCIAL-MICRO]  51.82,117.13 0 top
FD102  FIDUCIALUFIDUCIAL  [FIDUCIAL-MICRO]  51.82,117.13 0 bottom
FD103  FIDUCIALUFIDUCIAL  [FIDUCIAL-MICRO]  39.59,93.31 0 bottom
FD104  FIDUCIALUFIDUCIAL  [FIDUCIAL-MICRO]  39.59,93.31 0 top
FD105  FIDUCIALUFIDUCIAL  [FIDUCIAL-MICRO]  77.72,117.13 0 top
FD106  FIDUCIALUFIDUCIAL  [FIDUCIAL-MICRO]  77.72,117.13 0 bottom
FD107  FIDUCIALUFIDUCIAL  [FIDUCIAL-MICRO]  65.5,93.31 0 bottom
FD108  FIDUCIALUFIDUCIAL  [FIDUCIAL-MICRO]  65.5,93.31 0 top
FD109  FIDUCIALUFIDUCIAL  [FIDUCIAL-MICRO]  103.63,117.13 0 top
FD110  FIDUCIALUFIDUCIAL  [FIDUCIAL-MICRO]  103.63,117.13 0 bottom
FD111  FIDUCIALUFIDUCIAL  [FIDUCIAL-MICRO]  91.41,93.31 0 bottom
FD112  FIDUCIALUFIDUCIAL  [FIDUCIAL-MICRO]  91.41,93.31 0 top
FD113  FIDUCIALUFIDUCIAL  [FIDUCIAL-MICRO]  129.54,117.13 0 top
FD114  FIDUCIALUFIDUCIAL  [FIDUCIAL-MICRO]  129.54,117.13 0 bottom
FD115  FIDUCIALUFIDUCIAL  [FIDUCIAL-MICRO]  117.32,93.31 0 bottom
FD116  FIDUCIALUFIDUCIAL  [FIDUCIAL-MICRO]  117.32,93.31 0 top
FD117  FIDUCIALUFIDUCIAL  [FIDUCIAL-MICRO]  155.45,117.13 0 top
FD118  FIDUCIALUFIDUCIAL  [FIDUCIAL-MICRO]  155.45,117.13 0 bottom
FD119  FIDUCIALUFIDUCIAL  [FIDUCIAL-MICRO]  143.22,93.31 0 bottom
FD120  FIDUCIALUFIDUCIAL  [FIDUCIAL-MICRO]  143.22,93.31 0 top
FD121  FIDUCIALUFIDUCIAL  [FIDUCIAL-MICRO]  181.36,117.13 0 top
FD122  FIDUCIALUFIDUCIAL  [FIDUCIAL-MICRO]  181.36,117.13 0 bottom
FD123  FIDUCIALUFIDUCIAL  [FIDUCIAL-MICRO]  169.13,93.31 0 bottom
FD124  FIDUCIALUFIDUCIAL  [FIDUCIAL-MICRO]  169.13,93.31 0 top
FD125  FIDUCIALUFIDUCIAL  [FIDUCIAL-MICRO]  207.26,117.13 0 top
FD126  FIDUCIALUFIDUCIAL  [FIDUCIAL-MICRO]  207.26,117.13 0 bottom
FD127  FIDUCIALUFIDUCIAL  [FIDUCIAL-MICRO]  195.04,93.31 0 bottom
FD128  FIDUCIALUFIDUCIAL  [FIDUCIAL-MICRO]  195.04,93.31 0 top
FD129  FIDUCIALUFIDUCIAL  [FIDUCIAL-MICRO]  25.91,145.57 0 top
FD130  FIDUCIALUFIDUCIAL  [FIDUCIAL-MICRO]  25.91,145.57 0 bottom
FD131  FIDUCIALUFIDUCIAL  [FIDUCIAL-MICRO]  13.68,121.76 0 bottom
FD132  FIDUCIALUFIDUCIAL  [FIDUCIAL-MICRO]  13.68,121.76 0 top
FD133  FIDUCIALUFIDUCIAL  [FIDUCIAL-MICRO]  51.82,145.57 0 top
FD134  FIDUCIALUFIDUCIAL  [FIDUCIAL-MICRO]  51.82,145.57 0 bottom
FD135  FIDUCIALUFIDUCIAL  [FIDUCIAL-MICRO]  39.59,121.76 0 bottom
FD136  FIDUCIALUFIDUCIAL  [FIDUCIAL-MICRO]  39.59,121.76 0 top
FD137  FIDUCIALUFIDUCIAL  [FIDUCIAL-MICRO]  77.72,145.57 0 top
FD138  FIDUCIALUFIDUCIAL  [FIDUCIAL-MICRO]  77.72,145.57 0 bottom
FD139  FIDUCIALUFIDUCIAL  [FIDUCIAL-MICRO]  65.5,121.76 0 bottom
FD140  FIDUCIALUFIDUCIAL  [FIDUCIAL-MICRO]  65.5,121.76 0 top
FD141  FIDUCIALUFIDUCIAL  [FIDUCIAL-MICRO]  103.63,145.57 0 top
FD142  FIDUCIALUFIDUCIAL  [FIDUCIAL-MICRO]  103.63,145.57 0 bottom
FD143  FIDUCIALUFIDUCIAL  [FIDUCIAL-MICRO]  91.41,121.76 0 bottom
FD144  FIDUCIALUFIDUCIAL  [FIDUCIAL-MICRO]  91.41,121.76 0 top
FD145  FIDUCIALUFIDUCIAL  [FIDUCIAL-MICRO]  129.54,145.57 0 top
FD146  FIDUCIALUFIDUCIAL  [FIDUCIAL-MICRO]  129.54,145.57 0 bottom
FD147  FIDUCIALUFIDUCIAL  [FIDUCIAL-MICRO]  117.32,121.76 0 bottom
FD148  FIDUCIALUFIDUCIAL  [FIDUCIAL-MICRO]  117.32,121.76 0 top
FD149  FIDUCIALUFIDUCIAL  [FIDUCIAL-MICRO]  155.45,145.57 0 top
FD150  FIDUCIALUFIDUCIAL  [FIDUCIAL-MICRO]  155.45,145.57 0 bottom
FD151  FIDUCIALUFIDUCIAL  [FIDUCIAL-MICRO]  143.22,121.76 0 bottom
FD152  FIDUCIALUFIDUCIAL  [FIDUCIAL-MICRO]  143.22,121.76 0 top
FD153  FIDUCIALUFIDUCIAL  [FIDUCIAL-MICRO]  181.36,145.57 0 top
FD154  FIDUCIALUFIDUCIAL  [FIDUCIAL-MICRO]  181.36,145.57 0 bottom
FD155  FIDUCIALUFIDUCIAL  [FIDUCIAL-MICRO]  169.13,121.76 0 bottom
FD156  FIDUCIALUFIDUCIAL  [FIDUCIAL-MICRO]  169.13,121.76 0 top
FD157  FIDUCIALUFIDUCIAL  [FIDUCIAL-MICRO]  207.26,145.57 0 top
FD158  FIDUCIALUFIDUCIAL  [FIDUCIAL-MICRO]  207.26,145.57 0 bottom
FD159  FIDUCIALUFIDUCIAL  [FIDUCIAL-MICRO]  195.04,121.76 0 bottom
FD160  FIDUCIALUFIDUCIAL  [FIDUCIAL-MICRO]  195.04,121.76 0 top
J1  [1X04]  8.13,8.13 90 top
J2  [1X04]  30.99,8.13 90 top
J3  [1X01]  8.13,18.29 0 top
J4  [1X01]  30.99,18.29 0 top
J5  [1X04]  34.04,8.13 90 top
J6  [1X04]  56.9,8.13 90 top
J7  [1X01]  34.04,18.29 0 top
J8  [1X01]  56.9,18.29 0 top
J9  [1X04]  59.94,8.13 90 top
J10  [1X04]  82.8,8.13 90 top
J11  [1X01]  59.94,18.29 0 top
J12  [1X01]  82.8,18.29 0 top
J13  [1X04]  85.85,8.13 90 top
J14  [1X04]  108.71,8.13 90 top
J15  [1X01]  85.85,18.29 0 top
J16  [1X01]  108.71,18.29 0 top
J17  [1X04]  111.76,8.13 90 top
J18  [1X04]  134.62,8.13 90 top
J19  [1X01]  111.76,18.29 0 top
J20  [1X01]  134.62,18.29 0 top
J21  [1X04]  137.67,8.13 90 top
J22  [1X04]  160.53,8.13 90 top
J23  [1X01]  137.67,18.29 0 top
J24  [1X01]  160.53,18.29 0 top
J25  [1X04]  163.58,8.13 90 top
J26  [1X04]  186.44,8.13 90 top
J27  [1X01]  163.58,18.29 0 top
J28  [1X01]  186.44,18.29 0 top
J29  [1X04]  189.48,8.13 90 top
J30  [1X04]  212.34,8.13 90 top
J31  [1X01]  189.48,18.29 0 top
J32  [1X01]  212.34,18.29 0 top
J33  [1X04]  8.13,36.58 90 top
J34  [1X04]  30.99,36.58 90 top
J35  [1X01]  8.13,46.74 0 top
J36  [1X01]  30.99,46.74 0 top
J37  [1X04]  34.04,36.58 90 top
J38  [1X04]  56.9,36.58 90 top
J39  [1X01]  34.04,46.74 0 top
J40  [1X01]  56.9,46.74 0 top
J41  [1X04]  59.94,36.58 90 top
J42  [1X04]  82.8,36.58 90 top
J43  [1X01]  59.94,46.74 0 top
J44  [1X01]  82.8,46.74 0 top
J45  [1X04]  85.85,36.58 90 top
J46  [1X04]  108.71,36.58 90 top
J47  [1X01]  85.85,46.74 0 top
J48  [1X01]  108.71,46.74 0 top
J49  [1X04]  111.76,36.58 90 top
J50  [1X04]  134.62,36.58 90 top
J51  [1X01]  111.76,46.74 0 top
J52  [1X01]  134.62,46.74 0 top
J53  [1X04]  137.67,36.58 90 top
J54  [1X04]  160.53,36.58 90 top
J55  [1X01]  137.67,46.74 0 top
J56  [1X01]  160.53,46.74 0 top
J57  [1X04]  163.58,36.58 90 top
J58  [1X04]  186.44,36.58 90 top
J59  [1X01]  163.58,46.74 0 top
J60  [1X01]  186.44,46.74 0 top
J61  [1X04]  189.48,36.58 90 top
J62  [1X04]  212.34,36.58 90 top
J63  [1X01]  189.48,46.74 0 top
J64  [1X01]  212.34,46.74 0 top
J65  [1X04]  8.13,65.02 90 top
J66  [1X04]  30.99,65.02 90 top
J67  [1X01]  8.13,75.18 0 top
J68  [1X01]  30.99,75.18 0 top
J69  [1X04]  34.04,65.02 90 top
J70  [1X04]  56.9,65.02 90 top
J71  [1X01]  34.04,75.18 0 top
J72  [1X01]  56.9,75.18 0 top
J73  [1X04]  59.94,65.02 90 top
J74  [1X04]  82.8,65.02 90 top
J75  [1X01]  59.94,75.18 0 top
J76  [1X01]  82.8,75.18 0 top
J77  [1X04]  85.85,65.02 90 top
J78  [1X04]  108.71,65.02 90 top
J79  [1X01]  85.85,75.18 0 top
J80  [1X01]  108.71,75.18 0 top
J81  [1X04]  111.76,65.02 90 top
J82  [1X04]  134.62,65.02 90 top
J83  [1X01]  111.76,75.18 0 top
J84  [1X01]  134.62,75.18 0 top
J85  [1X04]  137.67,65.02 90 top
J86  [1X04]  160.53,65.02 90 top
J87  [1X01]  137.67,75.18 0 top
J88  [1X01]  160.53,75.18 0 top
J89  [1X04]  163.58,65.02 90 top
J90  [1X04]  186.44,65.02 90 top
J91  [1X01]  163.58,75.18 0 top
J92  [1X01]  186.44,75.18 0 top
J93  [1X04]  189.48,65.02 90 top
J94  [1X04]  212.34,65.02 90 top
J95  [1X01]  189.48,75.18 0 top
J96  [1X01]  212.34,75.18 0 top
J97  [1X04]  8.13,93.47 90 top
J98  [1X04]  30.99,93.47 90 top
J99  [1X01]  8.13,103.63 0 top
J100  [1X01]  30.99,103.63 0 top
J101  [1X04]  34.04,93.47 90 top
J102  [1X04]  56.9,93.47 90 top
J103  [1X01]  34.04,103.63 0 top
J104  [1X01]  56.9,103.63 0 top
J105  [1X04]  59.94,93.47 90 top
J106  [1X04]  82.8,93.47 90 top
J107  [1X01]  59.94,103.63 0 top
J108  [1X01]  82.8,103.63 0 top
J109  [1X04]  85.85,93.47 90 top
J110  [1X04]  108.71,93.47 90 top
J111  [1X01]  85.85,103.63 0 top
J112  [1X01]  108.71,103.63 0 top
J113  [1X04]  111.76,93.47 90 top
J114  [1X04]  134.62,93.47 90 top
J115  [1X01]  111.76,103.63 0 top
J116  [1X01]  134.62,103.63 0 top
J117  [1X04]  137.67,93.47 90 top
J118  [1X04]  160.53,93.47 90 top
J119  [1X01]  137.67,103.63 0 top
J120  [1X01]  160.53,103.63 0 top
J121  [1X04]  163.58,93.47 90 top
J122  [1X04]  186.44,93.47 90 top
J123  [1X01]  163.58,103.63 0 top
J124  [1X01]  186.44,103.63 0 top
J125  [1X04]  189.48,93.47 90 top
J126  [1X04]  212.34,93.47 90 top
J127  [1X01]  189.48,103.63 0 top
J128  [1X01]  212.34,103.63 0 top
J129  [1X04]  8.13,121.92 90 top
J130  [1X04]  30.99,121.92 90 top
J131  [1X01]  8.13,132.08 0 top
J132  [1X01]  30.99,132.08 0 top
J133  [1X04]  34.04,121.92 90 top
J134  [1X04]  56.9,121.92 90 top
J135  [1X01]  34.04,132.08 0 top
J136  [1X01]  56.9,132.08 0 top
J137  [1X04]  59.94,121.92 90 top
J138  [1X04]  82.8,121.92 90 top
J139  [1X01]  59.94,132.08 0 top
J140  [1X01]  82.8,132.08 0 top
J141  [1X04]  85.85,121.92 90 top
J142  [1X04]  108.71,121.92 90 top
J143  [1X01]  85.85,132.08 0 top
J144  [1X01]  108.71,132.08 0 top
J145  [1X04]  111.76,121.92 90 top
J146  [1X04]  134.62,121.92 90 top
J147  [1X01]  111.76,132.08 0 top
J148  [1X01]  134.62,132.08 0 top
J149  [1X04]  137.67,121.92 90 top
J150  [1X04]  160.53,121.92 90 top
J151  [1X01]  137.67,132.08 0 top
J152  [1X01]  160.53,132.08 0 top
J153  [1X04]  163.58,121.92 90 top
J154  [1X04]  186.44,121.92 90 top
J155  [1X01]  163.58,132.08 0 top
J156  [1X01]  186.44,132.08 0 top
J157  [1X04]  189.48,121.92 90 top
J158  [1X04]  212.34,121.92 90 top
J159  [1X01]  189.48,132.08 0 top
J160  [1X01]  212.34,132.08 0 top
JP1  VIN  [1X02]  34.04,28.45 90 top
JP2  455-1750-1-ND  [1X04]  56.9,30.99 270 top
JP3  455-1750-1-ND  [1X04]  30.99,30.99 270 top
JP4  VIN  [1X02]  59.94,28.45 90 top
JP5  455-1750-1-ND  [1X04]  82.8,30.99 270 top
JP6  VIN  [1X02]  85.85,28.45 90 top
JP7  VIN  [1X02]  8.13,28.45 90 top
JP8  455-1750-1-ND  [1X04]  108.71,30.99 270 top
JP9  VIN  [1X02]  111.76,28.45 90 top
JP10  455-1750-1-ND  [1X04]  134.62,30.99 270 top
JP11  VIN  [1X02]  137.67,28.45 90 top
JP12  455-1750-1-ND  [1X04]  160.53,30.99 270 top
JP13  VIN  [1X02]  163.58,28.45 90 top
JP14  455-1750-1-ND  [1X04]  186.44,30.99 270 top
JP15  VIN  [1X02]  189.48,28.45 90 top
JP16  455-1750-1-ND  [1X04]  212.34,30.99 270 top
JP17  VIN  [1X02]  8.13,56.9 90 top
JP18  455-1750-1-ND  [1X04]  30.99,59.44 270 top
JP19  VIN  [1X02]  34.04,56.9 90 top
JP20  455-1750-1-ND  [1X04]  56.9,59.44 270 top
JP21  VIN  [1X02]  59.94,56.9 90 top
JP22  455-1750-1-ND  [1X04]  82.8,59.44 270 top
JP23  VIN  [1X02]  85.85,56.9 90 top
JP24  455-1750-1-ND  [1X04]  108.71,59.44 270 top
JP25  VIN  [1X02]  111.76,56.9 90 top
JP26  455-1750-1-ND  [1X04]  134.62,59.44 270 top
JP27  VIN  [1X02]  137.67,56.9 90 top
JP28  455-1750-1-ND  [1X04]  160.53,59.44 270 top
JP29  VIN  [1X02]  163.58,56.9 90 top
JP30  455-1750-1-ND  [1X04]  186.44,59.44 270 top
JP31  VIN  [1X02]  189.48,56.9 90 top
JP32  455-1750-1-ND  [1X04]  212.34,59.44 270 top
JP33  VIN  [1X02]  8.13,85.34 90 top
JP34  455-1750-1-ND  [1X04]  30.99,87.88 270 top
JP35  VIN  [1X02]  34.04,85.34 90 top
JP36  455-1750-1-ND  [1X04]  56.9,87.88 270 top
JP37  VIN  [1X02]  59.94,85.34 90 top
JP38  455-1750-1-ND  [1X04]  82.8,87.88 270 top
JP39  VIN  [1X02]  85.85,85.34 90 top
JP40  455-1750-1-ND  [1X04]  108.71,87.88 270 top
JP41  VIN  [1X02]  111.76,85.34 90 top
JP42  455-1750-1-ND  [1X04]  134.62,87.88 270 top
JP43  VIN  [1X02]  137.67,85.34 90 top
JP44  455-1750-1-ND  [1X04]  160.53,87.88 270 top
JP45  VIN  [1X02]  163.58,85.34 90 top
JP46  455-1750-1-ND  [1X04]  186.44,87.88 270 top
JP47  VIN  [1X02]  189.48,85.34 90 top
JP48  455-1750-1-ND  [1X04]  212.34,87.88 270 top
JP49  VIN  [1X02]  8.13,113.79 90 top
JP50  455-1750-1-ND  [1X04]  30.99,116.33 270 top
JP51  VIN  [1X02]  34.04,113.79 90 top
JP52  455-1750-1-ND  [1X04]  56.9,116.33 270 top
JP53  VIN  [1X02]  59.94,113.79 90 top
JP54  455-1750-1-ND  [1X04]  82.8,116.33 270 top
JP55  VIN  [1X02]  85.85,113.79 90 top
JP56  455-1750-1-ND  [1X04]  108.71,116.33 270 top
JP57  VIN  [1X02]  111.76,113.79 90 top
JP58  455-1750-1-ND  [1X04]  134.62,116.33 270 top
JP59  VIN  [1X02]  137.67,113.79 90 top
JP60  455-1750-1-ND  [1X04]  160.53,116.33 270 top
JP61  VIN  [1X02]  163.58,113.79 90 top
JP62  455-1750-1-ND  [1X04]  186.44,116.33 270 top
JP63  VIN  [1X02]  189.48,113.79 90 top
JP64  455-1750-1-ND  [1X04]  212.34,116.33 270 top
JP65  VIN  [1X02]  8.13,142.24 90 top
JP66  455-1750-1-ND  [1X04]  30.99,144.78 270 top
JP67  VIN  [1X02]  34.04,142.24 90 top
JP68  455-1750-1-ND  [1X04]  56.9,144.78 270 top
JP69  VIN  [1X02]  59.94,142.24 90 top
JP70  455-1750-1-ND  [1X04]  82.8,144.78 270 top
JP71  VIN  [1X02]  85.85,142.24 90 top
JP72  455-1750-1-ND  [1X04]  108.71,144.78 270 top
JP73  VIN  [1X02]  111.76,142.24 90 top
JP74  455-1750-1-ND  [1X04]  134.62,144.78 270 top
JP75  VIN  [1X02]  137.67,142.24 90 top
JP76  455-1750-1-ND  [1X04]  160.53,144.78 270 top
JP77  VIN  [1X02]  163.58,142.24 90 top
JP78  455-1750-1-ND  [1X04]  186.44,144.78 270 top
JP79  VIN  [1X02]  189.48,142.24 90 top
JP80  455-1750-1-ND  [1X04]  212.34,144.78 270 top
L1  2.2µH/±20%/1.5A  [INDUCTOR_2.2UH]  17.6,32.3 180 top
L2  2.2µH/±20%/1.5A  [INDUCTOR_2.2UH]  43.51,32.3 180 top
L3  2.2µH/±20%/1.5A  [INDUCTOR_2.2UH]  69.42,32.3 180 top
L4  2.2µH/±20%/1.5A  [INDUCTOR_2.2UH]  95.33,32.3 180 top
L5  2.2µH/±20%/1.5A  [INDUCTOR_2.2UH]  121.23,32.3 180 top
L6  2.2µH/±20%/1.5A  [INDUCTOR_2.2UH]  147.14,32.3 180 top
L7  2.2µH/±20%/1.5A  [INDUCTOR_2.2UH]  173.05,32.3 180 top
L8  2.2µH/±20%/1.5A  [INDUCTOR_2.2UH]  198.96,32.3 180 top
L9  2.2µH/±20%/1.5A  [INDUCTOR_2.2UH]  17.6,60.74 180 top
L10  2.2µH/±20%/1.5A  [INDUCTOR_2.2UH]  43.51,60.74 180 top
L11  2.2µH/±20%/1.5A  [INDUCTOR_2.2UH]  69.42,60.74 180 top
L12  2.2µH/±20%/1.5A  [INDUCTOR_2.2UH]  95.33,60.74 180 top
L13  2.2µH/±20%/1.5A  [INDUCTOR_2.2UH]  121.23,60.74 180 top
L14  2.2µH/±20%/1.5A  [INDUCTOR_2.2UH]  147.14,60.74 180 top
L15  2.2µH/±20%/1.5A  [INDUCTOR_2.2UH]  173.05,60.74 180 top
L16  2.2µH/±20%/1.5A  [INDUCTOR_2.2UH]  198.96,60.74 180 top
L17  2.2µH/±20%/1.5A  [INDUCTOR_2.2UH]  17.6,89.19 180 top
L18  2.2µH/±20%/1.5A  [INDUCTOR_2.2UH]  43.51,89.19 180 top
L19  2.2µH/±20%/1.5A  [INDUCTOR_2.2UH]  69.42,89.19 180 top
L20  2.2µH/±20%/1.5A  [INDUCTOR_2.2UH]  95.33,89.19 180 top
L21  2.2µH/±20%/1.5A  [INDUCTOR_2.2UH]  121.23,89.19 180 top
L22  2.2µH/±20%/1.5A  [INDUCTOR_2.2UH]  147.14,89.19 180 top
L23  2.2µH/±20%/1.5A  [INDUCTOR_2.2UH]  173.05,89.19 180 top
L24  2.2µH/±20%/1.5A  [INDUCTOR_2.2UH]  198.96,89.19 180 top
L25  2.2µH/±20%/1.5A  [INDUCTOR_2.2UH]  17.6,117.64 180 top
L26  2.2µH/±20%/1.5A  [INDUCTOR_2.2UH]  43.51,117.64 180 top
L27  2.2µH/±20%/1.5A  [INDUCTOR_2.2UH]  69.42,117.64 180 top
L28  2.2µH/±20%/1.5A  [INDUCTOR_2.2UH]  95.33,117.64 180 top
L29  2.2µH/±20%/1.5A  [INDUCTOR_2.2UH]  121.23,117.64 180 top
L30  2.2µH/±20%/1.5A  [INDUCTOR_2.2UH]  147.14,117.64 180 top
L31  2.2µH/±20%/1.5A  [INDUCTOR_2.2UH]  173.05,117.64 180 top
L32  2.2µH/±20%/1.5A  [INDUCTOR_2.2UH]  198.96,117.64 180 top
L33  2.2µH/±20%/1.5A  [INDUCTOR_2.2UH]  17.6,146.09 180 top
L34  2.2µH/±20%/1.5A  [INDUCTOR_2.2UH]  43.51,146.09 180 top
L35  2.2µH/±20%/1.5A  [INDUCTOR_2.2UH]  69.42,146.09 180 top
L36  2.2µH/±20%/1.5A  [INDUCTOR_2.2UH]  95.33,146.09 180 top
L37  2.2µH/±20%/1.5A  [INDUCTOR_2.2UH]  121.23,146.09 180 top
L38  2.2µH/±20%/1.5A  [INDUCTOR_2.2UH]  147.14,146.09 180 top
L39  2.2µH/±20%/1.5A  [INDUCTOR_2.2UH]  173.05,146.09 180 top
L40  2.2µH/±20%/1.5A  [INDUCTOR_2.2UH]  198.96,146.09 180 top
LOGO1  SFE_LOGO_NAME_FLAME.1_INCH  [SFE_LOGO_NAME_FLAME_.1]  25.27,25.91 0 bottom
LOGO2  OSHW-LOGOS  [OSHW-LOGO-S]  10.39,22.97 0 bottom
LOGO3  OSHW-LOGOS  [OSHW-LOGO-S]  36.3,22.97 0 bottom
LOGO4  SFE_LOGO_NAME_FLAME.1_INCH  [SFE_LOGO_NAME_FLAME_.1]  51.18,25.91 0 bottom
LOGO5  OSHW-LOGOS  [OSHW-LOGO-S]  62.2,22.97 0 bottom
LOGO6  SFE_LOGO_NAME_FLAME.1_INCH  [SFE_LOGO_NAME_FLAME_.1]  77.09,25.91 0 bottom
LOGO7  OSHW-LOGOS  [OSHW-LOGO-S]  88.11,22.97 0 bottom
LOGO8  SFE_LOGO_NAME_FLAME.1_INCH  [SFE_LOGO_NAME_FLAME_.1]  103,25.91 0 bottom
LOGO9  OSHW-LOGOS  [OSHW-LOGO-S]  114.02,22.97 0 bottom
LOGO10  SFE_LOGO_NAME_FLAME.1_INCH  [SFE_LOGO_NAME_FLAME_.1]  128.91,25.91 0 bottom
LOGO11  OSHW-LOGOS  [OSHW-LOGO-S]  139.93,22.97 0 bottom
LOGO12  SFE_LOGO_NAME_FLAME.1_INCH  [SFE_LOGO_NAME_FLAME_.1]  154.81,25.91 0 bottom
LOGO13  OSHW-LOGOS  [OSHW-LOGO-S]  165.84,22.97 0 bottom
LOGO14  SFE_LOGO_NAME_FLAME.1_INCH  [SFE_LOGO_NAME_FLAME_.1]  180.72,25.91 0 bottom
LOGO15  OSHW-LOGOS  [OSHW-LOGO-S]  191.74,22.97 0 bottom
LOGO16  SFE_LOGO_NAME_FLAME.1_INCH  [SFE_LOGO_NAME_FLAME_.1]  206.63,25.91 0 bottom
LOGO17  OSHW-LOGOS  [OSHW-LOGO-S]  10.39,51.42 0 bottom
LOGO18  SFE_LOGO_NAME_FLAME.1_INCH  [SFE_LOGO_NAME_FLAME_.1]  25.27,54.36 0 bottom
LOGO19  OSHW-LOGOS  [OSHW-LOGO-S]  36.3,51.42 0 bottom
LOGO20  SFE_LOGO_NAME_FLAME.1_INCH  [SFE_LOGO_NAME_FLAME_.1]  51.18,54.36 0 bottom
LOGO21  OSHW-LOGOS  [OSHW-LOGO-S]  62.2,51.42 0 bottom
LOGO22  SFE_LOGO_NAME_FLAME.1_INCH  [SFE_LOGO_NAME_FLAME_.1]  77.09,54.36 0 bottom
LOGO23  OSHW-LOGOS  [OSHW-LOGO-S]  88.11,51.42 0 bottom
LOGO24  SFE_LOGO_NAME_FLAME.1_INCH  [SFE_LOGO_NAME_FLAME_.1]  103,54.36 0 bottom
LOGO25  OSHW-LOGOS  [OSHW-LOGO-S]  114.02,51.42 0 bottom
LOGO26  SFE_LOGO_NAME_FLAME.1_INCH  [SFE_LOGO_NAME_FLAME_.1]  128.91,54.36 0 bottom
LOGO27  OSHW-LOGOS  [OSHW-LOGO-S]  139.93,51.42 0 bottom
LOGO28  SFE_LOGO_NAME_FLAME.1_INCH  [SFE_LOGO_NAME_FLAME_.1]  154.81,54.36 0 bottom
LOGO29  OSHW-LOGOS  [OSHW-LOGO-S]  165.84,51.42 0 bottom
LOGO30  SFE_LOGO_NAME_FLAME.1_INCH  [SFE_LOGO_NAME_FLAME_.1]  180.72,54.36 0 bottom
LOGO31  OSHW-LOGOS  [OSHW-LOGO-S]  191.74,51.42 0 bottom
LOGO32  SFE_LOGO_NAME_FLAME.1_INCH  [SFE_LOGO_NAME_FLAME_.1]  206.63,54.36 0 bottom
LOGO33  OSHW-LOGOS  [OSHW-LOGO-S]  10.39,79.87 0 bottom
LOGO34  SFE_LOGO_NAME_FLAME.1_INCH  [SFE_LOGO_NAME_FLAME_.1]  25.27,82.8 0 bottom
LOGO35  OSHW-LOGOS  [OSHW-LOGO-S]  36.3,79.87 0 bottom
LOGO36  SFE_LOGO_NAME_FLAME.1_INCH  [SFE_LOGO_NAME_FLAME_.1]  51.18,82.8 0 bottom
LOGO37  OSHW-LOGOS  [OSHW-LOGO-S]  62.2,79.87 0 bottom
LOGO38  SFE_LOGO_NAME_FLAME.1_INCH  [SFE_LOGO_NAME_FLAME_.1]  77.09,82.8 0 bottom
LOGO39  OSHW-LOGOS  [OSHW-LOGO-S]  88.11,79.87 0 bottom
LOGO40  SFE_LOGO_NAME_FLAME.1_INCH  [SFE_LOGO_NAME_FLAME_.1]  103,82.8 0 bottom
LOGO41  OSHW-LOGOS  [OSHW-LOGO-S]  114.02,79.87 0 bottom
LOGO42  SFE_LOGO_NAME_FLAME.1_INCH  [SFE_LOGO_NAME_FLAME_.1]  128.91,82.8 0 bottom
LOGO43  OSHW-LOGOS  [OSHW-LOGO-S]  139.93,79.87 0 bottom
LOGO44  SFE_LOGO_NAME_FLAME.1_INCH  [SFE_LOGO_NAME_FLAME_.1]  154.81,82.8 0 bottom
LOGO45  OSHW-LOGOS  [OSHW-LOGO-S]  165.84,79.87 0 bottom
LOGO46  SFE_LOGO_NAME_FLAME.1_INCH  [SFE_LOGO_NAME_FLAME_.1]  180.72,82.8 0 bottom
LOGO47  OSHW-LOGOS  [OSHW-LOGO-S]  191.74,79.87 0 bottom
LOGO48  SFE_LOGO_NAME_FLAME.1_INCH  [SFE_LOGO_NAME_FLAME_.1]  206.63,82.8 0 bottom
LOGO49  OSHW-LOGOS  [OSHW-LOGO-S]  10.39,108.32 0 bottom
LOGO50  SFE_LOGO_NAME_FLAME.1_INCH  [SFE_LOGO_NAME_FLAME_.1]  25.27,111.25 0 bottom
LOGO51  OSHW-LOGOS  [OSHW-LOGO-S]  36.3,108.32 0 bottom
LOGO52  SFE_LOGO_NAME_FLAME.1_INCH  [SFE_LOGO_NAME_FLAME_.1]  51.18,111.25 0 bottom
LOGO53  OSHW-LOGOS  [OSHW-LOGO-S]  62.2,108.32 0 bottom
LOGO54  SFE_LOGO_NAME_FLAME.1_INCH  [SFE_LOGO_NAME_FLAME_.1]  77.09,111.25 0 bottom
LOGO55  OSHW-LOGOS  [OSHW-LOGO-S]  88.11,108.32 0 bottom
LOGO56  SFE_LOGO_NAME_FLAME.1_INCH  [SFE_LOGO_NAME_FLAME_.1]  103,111.25 0 bottom
LOGO57  OSHW-LOGOS  [OSHW-LOGO-S]  114.02,108.32 0 bottom
LOGO58  SFE_LOGO_NAME_FLAME.1_INCH  [SFE_LOGO_NAME_FLAME_.1]  128.91,111.25 0 bottom
LOGO59  OSHW-LOGOS  [OSHW-LOGO-S]  139.93,108.32 0 bottom
LOGO60  SFE_LOGO_NAME_FLAME.1_INCH  [SFE_LOGO_NAME_FLAME_.1]  154.81,111.25 0 bottom
LOGO61  OSHW-LOGOS  [OSHW-LOGO-S]  165.84,108.32 0 bottom
LOGO62  SFE_LOGO_NAME_FLAME.1_INCH  [SFE_LOGO_NAME_FLAME_.1]  180.72,111.25 0 bottom
LOGO63  OSHW-LOGOS  [OSHW-LOGO-S]  191.74,108.32 0 bottom
LOGO64  SFE_LOGO_NAME_FLAME.1_INCH  [SFE_LOGO_NAME_FLAME_.1]  206.63,111.25 0 bottom
LOGO65  OSHW-LOGOS  [OSHW-LOGO-S]  10.39,136.77 0 bottom
LOGO66  SFE_LOGO_NAME_FLAME.1_INCH  [SFE_LOGO_NAME_FLAME_.1]  25.27,139.7 0 bottom
LOGO67  OSHW-LOGOS  [OSHW-LOGO-S]  36.3,136.77 0 bottom
LOGO68  SFE_LOGO_NAME_FLAME.1_INCH  [SFE_LOGO_NAME_FLAME_.1]  51.18,139.7 0 bottom
LOGO69  OSHW-LOGOS  [OSHW-LOGO-S]  62.2,136.77 0 bottom
LOGO70  SFE_LOGO_NAME_FLAME.1_INCH  [SFE_LOGO_NAME_FLAME_.1]  77.09,139.7 0 bottom
LOGO71  OSHW-LOGOS  [OSHW-LOGO-S]  88.11,136.77 0 bottom
LOGO72  SFE_LOGO_NAME_FLAME.1_INCH  [SFE_LOGO_NAME_FLAME_.1]  103,139.7 0 bottom
LOGO73  OSHW-LOGOS  [OSHW-LOGO-S]  114.02,136.77 0 bottom
LOGO74  SFE_LOGO_NAME_FLAME.1_INCH  [SFE_LOGO_NAME_FLAME_.1]  128.91,139.7 0 bottom
LOGO75  OSHW-LOGOS  [OSHW-LOGO-S]  139.93,136.77 0 bottom
LOGO76  SFE_LOGO_NAME_FLAME.1_INCH  [SFE_LOGO_NAME_FLAME_.1]  154.81,139.7 0 bottom
LOGO77  OSHW-LOGOS  [OSHW-LOGO-S]  165.84,136.77 0 bottom
LOGO78  SFE_LOGO_NAME_FLAME.1_INCH  [SFE_LOGO_NAME_FLAME_.1]  180.72,139.7 0 bottom
LOGO79  OSHW-LOGOS  [OSHW-LOGO-S]  191.74,136.77 0 bottom
LOGO80  SFE_LOGO_NAME_FLAME.1_INCH  [SFE_LOGO_NAME_FLAME_.1]  206.63,139.7 0 bottom
R1  [AXIAL-0.3]  19.56,8.13 0 top
R2  22k  [0603]  13.69,11.94 270 top
R3  13k  [0603]  19.56,8.13 0 top
R4  1k  [0603]  23.72,12.8 90 top
R5  1.8M  [0603]  24.96,24.16 0 top
R6  200k  [0603]  21.62,24.16 0 top
R7  200k  [0603]  47.53,24.16 0 top
R8  1.8M  [0603]  50.86,24.16 0 top
R9  13k  [0603]  45.47,8.13 0 top
R10  22k  [0603]  39.6,11.94 270 top
R11  [AXIAL-0.3]  45.47,8.13 0 top
R12  1k  [0603]  49.63,12.8 90 top
R13  200k  [0603]  73.44,24.16 0 top
R14  1.8M  [0603]  76.77,24.16 0 top
R15  13k  [0603]  71.37,8.13 0 top
R16  22k  [0603]  65.51,11.94 270 top
R17  [AXIAL-0.3]  71.37,8.13 0 top
R18  1k  [0603]  75.54,12.8 90 top
R19  200k  [0603]  99.35,24.16 0 top
R20  1.8M  [0603]  102.68,24.16 0 top
R21  13k  [0603]  97.28,8.13 0 top
R22  22k  [0603]  91.42,11.94 270 top
R23  [AXIAL-0.3]  97.28,8.13 0 top
R24  1k  [0603]  101.44,12.8 90 top
R25  200k  [0603]  125.25,24.16 0 top
R26  1.8M  [0603]  128.59,24.16 0 top
R27  13k  [0603]  123.19,8.13 0 top
R28  22k  [0603]  117.33,11.94 270 top
R29  [AXIAL-0.3]  123.19,8.13 0 top
R30  1k  [0603]  127.35,12.8 90 top
R31  200k  [0603]  151.16,24.16 0 top
R32  1.8M  [0603]  154.5,24.16 0 top
R33  13k  [0603]  149.1,8.13 0 top
R34  22k  [0603]  143.23,11.94 270 top
R35  [AXIAL-0.3]  149.1,8.13 0 top
R36  1k  [0603]  153.26,12.8 90 top
R37  200k  [0603]  177.07,24.16 0 top
R38  1.8M  [0603]  180.4,24.16 0 top
R39  13k  [0603]  175.01,8.13 0 top
R40  22k  [0603]  169.14,11.94 270 top
R41  [AXIAL-0.3]  175.01,8.13 0 top
R42  1k  [0603]  179.17,12.8 90 top
R43  200k  [0603]  202.98,24.16 0 top
R44  1.8M  [0603]  206.31,24.16 0 top
R45  13k  [0603]  200.91,8.13 0 top
R46  22k  [0603]  195.05,11.94 270 top
R47  [AXIAL-0.3]  200.91,8.13 0 top
R48  1k  [0603]  205.08,12.8 90 top
R49  200k  [0603]  21.62,52.61 0 top
R50  1.8M  [0603]  24.96,52.61 0 top
R51  13k  [0603]  19.56,36.58 0 top
R52  22k  [0603]  13.69,40.39 270 top
R53  [AXIAL-0.3]  19.56,36.58 0 top
R54  1k  [0603]  23.72,41.25 90 top
R55  200k  [0603]  47.53,52.61 0 top
R56  1.8M  [0603]  50.86,52.61 0 top
R57  13k  [0603]  45.47,36.58 0 top
R58  22k  [0603]  39.6,40.39 270 top
R59  [AXIAL-0.3]  45.47,36.58 0 top
R60  1k  [0603]  49.63,41.25 90 top
R61  200k  [0603]  73.44,52.61 0 top
R62  1.8M  [0603]  76.77,52.61 0 top
R63  13k  [0603]  71.37,36.58 0 top
R64  22k  [0603]  65.51,40.39 270 top
R65  [AXIAL-0.3]  71.37,36.58 0 top
R66  1k  [0603]  75.54,41.25 90 top
R67  200k  [0603]  99.35,52.61 0 top
R68  1.8M  [0603]  102.68,52.61 0 top
R69  13k  [0603]  97.28,36.58 0 top
R70  22k  [0603]  91.42,40.39 270 top
R71  [AXIAL-0.3]  97.28,36.58 0 top
R72  1k  [0603]  101.44,41.25 90 top
R73  200k  [0603]  125.25,52.61 0 top
R74  1.8M  [0603]  128.59,52.61 0 top
R75  13k  [0603]  123.19,36.58 0 top
R76  22k  [0603]  117.33,40.39 270 top
R77  [AXIAL-0.3]  123.19,36.58 0 top
R78  1k  [0603]  127.35,41.25 90 top
R79  200k  [0603]  151.16,52.61 0 top
R80  1.8M  [0603]  154.5,52.61 0 top
R81  13k  [0603]  149.1,36.58 0 top
R82  22k  [0603]  143.23,40.39 270 top
R83  [AXIAL-0.3]  149.1,36.58 0 top
R84  1k  [0603]  153.26,41.25 90 top
R85  200k  [0603]  177.07,52.61 0 top
R86  1.8M  [0603]  180.4,52.61 0 top
R87  13k  [0603]  175.01,36.58 0 top
R88  22k  [0603]  169.14,40.39 270 top
R89  [AXIAL-0.3]  175.01,36.58 0 top
R90  1k  [0603]  179.17,41.25 90 top
R91  200k  [0603]  202.98,52.61 0 top
R92  1.8M  [0603]  206.31,52.61 0 top
R93  13k  [0603]  200.91,36.58 0 top
R94  22k  [0603]  195.05,40.39 270 top
R95  [AXIAL-0.3]  200.91,36.58 0 top
R96  1k  [0603]  205.08,41.25 90 top
R97  200k  [0603]  21.62,81.06 0 top
R98  1.8M  [0603]  24.96,81.06 0 top
R99  13k  [0603]  19.56,65.02 0 top
R100  22k  [0603]  13.69,68.83 270 top
R101  [AXIAL-0.3]  19.56,65.02 0 top
R102  1k  [0603]  23.72,69.7 90 top
R103  200k  [0603]  47.53,81.06 0 top
R104  1.8M  [0603]  50.86,81.06 0 top
R105  13k  [0603]  45.47,65.02 0 top
R106  22k  [0603]  39.6,68.83 270 top
R107  [AXIAL-0.3]  45.47,65.02 0 top
R108  1k  [0603]  49.63,69.7 90 top
R109  200k  [0603]  73.44,81.06 0 top
R110  1.8M  [0603]  76.77,81.06 0 top
R111  13k  [0603]  71.37,65.02 0 top
R112  22k  [0603]  65.51,68.83 270 top
R113  [AXIAL-0.3]  71.37,65.02 0 top
R114  1k  [0603]  75.54,69.7 90 top
R115  200k  [0603]  99.35,81.06 0 top
R116  1.8M  [0603]  102.68,81.06 0 top
R117  13k  [0603]  97.28,65.02 0 top
R118  22k  [0603]  91.42,68.83 270 top
R119  [AXIAL-0.3]  97.28,65.02 0 top
R120  1k  [0603]  101.44,69.7 90 top
R121  200k  [0603]  125.25,81.06 0 top
R122  1.8M  [0603]  128.59,81.06 0 top
R123  13k  [0603]  123.19,65.02 0 top
R124  22k  [0603]  117.33,68.83 270 top
R125  [AXIAL-0.3]  123.19,65.02 0 top
R126  1k  [0603]  127.35,69.7 90 top
R127  200k  [0603]  151.16,81.06 0 top
R128  1.8M  [0603]  154.5,81.06 0 top
R129  13k  [0603]  149.1,65.02 0 top
R130  22k  [0603]  143.23,68.83 270 top
R131  [AXIAL-0.3]  149.1,65.02 0 top
R132  1k  [0603]  153.26,69.7 90 top
R133  200k  [0603]  177.07,81.06 0 top
R134  1.8M  [0603]  180.4,81.06 0 top
R135  13k  [0603]  175.01,65.02 0 top
R136  22k  [0603]  169.14,68.83 270 top
R137  [AXIAL-0.3]  175.01,65.02 0 top
R138  1k  [0603]  179.17,69.7 90 top
R139  200k  [0603]  202.98,81.06 0 top
R140  1.8M  [0603]  206.31,81.06 0 top
R141  13k  [0603]  200.91,65.02 0 top
R142  22k  [0603]  195.05,68.83 270 top
R143  [AXIAL-0.3]  200.91,65.02 0 top
R144  1k  [0603]  205.08,69.7 90 top
R145  200k  [0603]  21.62,109.51 0 top
R146  1.8M  [0603]  24.96,109.51 0 top
R147  13k  [0603]  19.56,93.47 0 top
R148  22k  [0603]  13.69,97.28 270 top
R149  [AXIAL-0.3]  19.56,93.47 0 top
R150  1k  [0603]  23.72,98.15 90 top
R151  200k  [0603]  47.53,109.51 0 top
R152  1.8M  [0603]  50.86,109.51 0 top
R153  13k  [0603]  45.47,93.47 0 top
R154  22k  [0603]  39.6,97.28 270 top
R155  [AXIAL-0.3]  45.47,93.47 0 top
R156  1k  [0603]  49.63,98.15 90 top
R157  200k  [0603]  73.44,109.51 0 top
R158  1.8M  [0603]  76.77,109.51 0 top
R159  13k  [0603]  71.37,93.47 0 top
R160  22k  [0603]  65.51,97.28 270 top
R161  [AXIAL-0.3]  71.37,93.47 0 top
R162  1k  [0603]  75.54,98.15 90 top
R163  200k  [0603]  99.35,109.51 0 top
R164  1.8M  [0603]  102.68,109.51 0 top
R165  13k  [0603]  97.28,93.47 0 top
R166  22k  [0603]  91.42,97.28 270 top
R167  [AXIAL-0.3]  97.28,93.47 0 top
R168  1k  [0603]  101.44,98.15 90 top
R169  200k  [0603]  125.25,109.51 0 top
R170  1.8M  [0603]  128.59,109.51 0 top
R171  13k  [0603]  123.19,93.47 0 top
R172  22k  [0603]  117.33,97.28 270 top
R173  [AXIAL-0.3]  123.19,93.47 0 top
R174  1k  [0603]  127.35,98.15 90 top
R175  200k  [0603]  151.16,109.51 0 top
R176  1.8M  [0603]  154.5,109.51 0 top
R177  13k  [0603]  149.1,93.47 0 top
R178  22k  [0603]  143.23,97.28 270 top
R179  [AXIAL-0.3]  149.1,93.47 0 top
R180  1k  [0603]  153.26,98.15 90 top
R181  200k  [0603]  177.07,109.51 0 top
R182  1.8M  [0603]  180.4,109.51 0 top
R183  13k  [0603]  175.01,93.47 0 top
R184  22k  [0603]  169.14,97.28 270 top
R185  [AXIAL-0.3]  175.01,93.47 0 top
R186  1k  [0603]  179.17,98.15 90 top
R187  200k  [0603]  202.98,109.51 0 top
R188  1.8M  [0603]  206.31,109.51 0 top
R189  13k  [0603]  200.91,93.47 0 top
R190  22k  [0603]  195.05,97.28 270 top
R191  [AXIAL-0.3]  200.91,93.47 0 top
R192  1k  [0603]  205.08,98.15 90 top
R193  200k  [0603]  21.62,137.95 0 top
R194  1.8M  [0603]  24.96,137.95 0 top
R195  13k  [0603]  19.56,121.92 0 top
R196  22k  [0603]  13.69,125.73 270 top